# EAGLE board AlidadeEEBoxuCntrlr (EAGLE 4.13), part 1 of 2
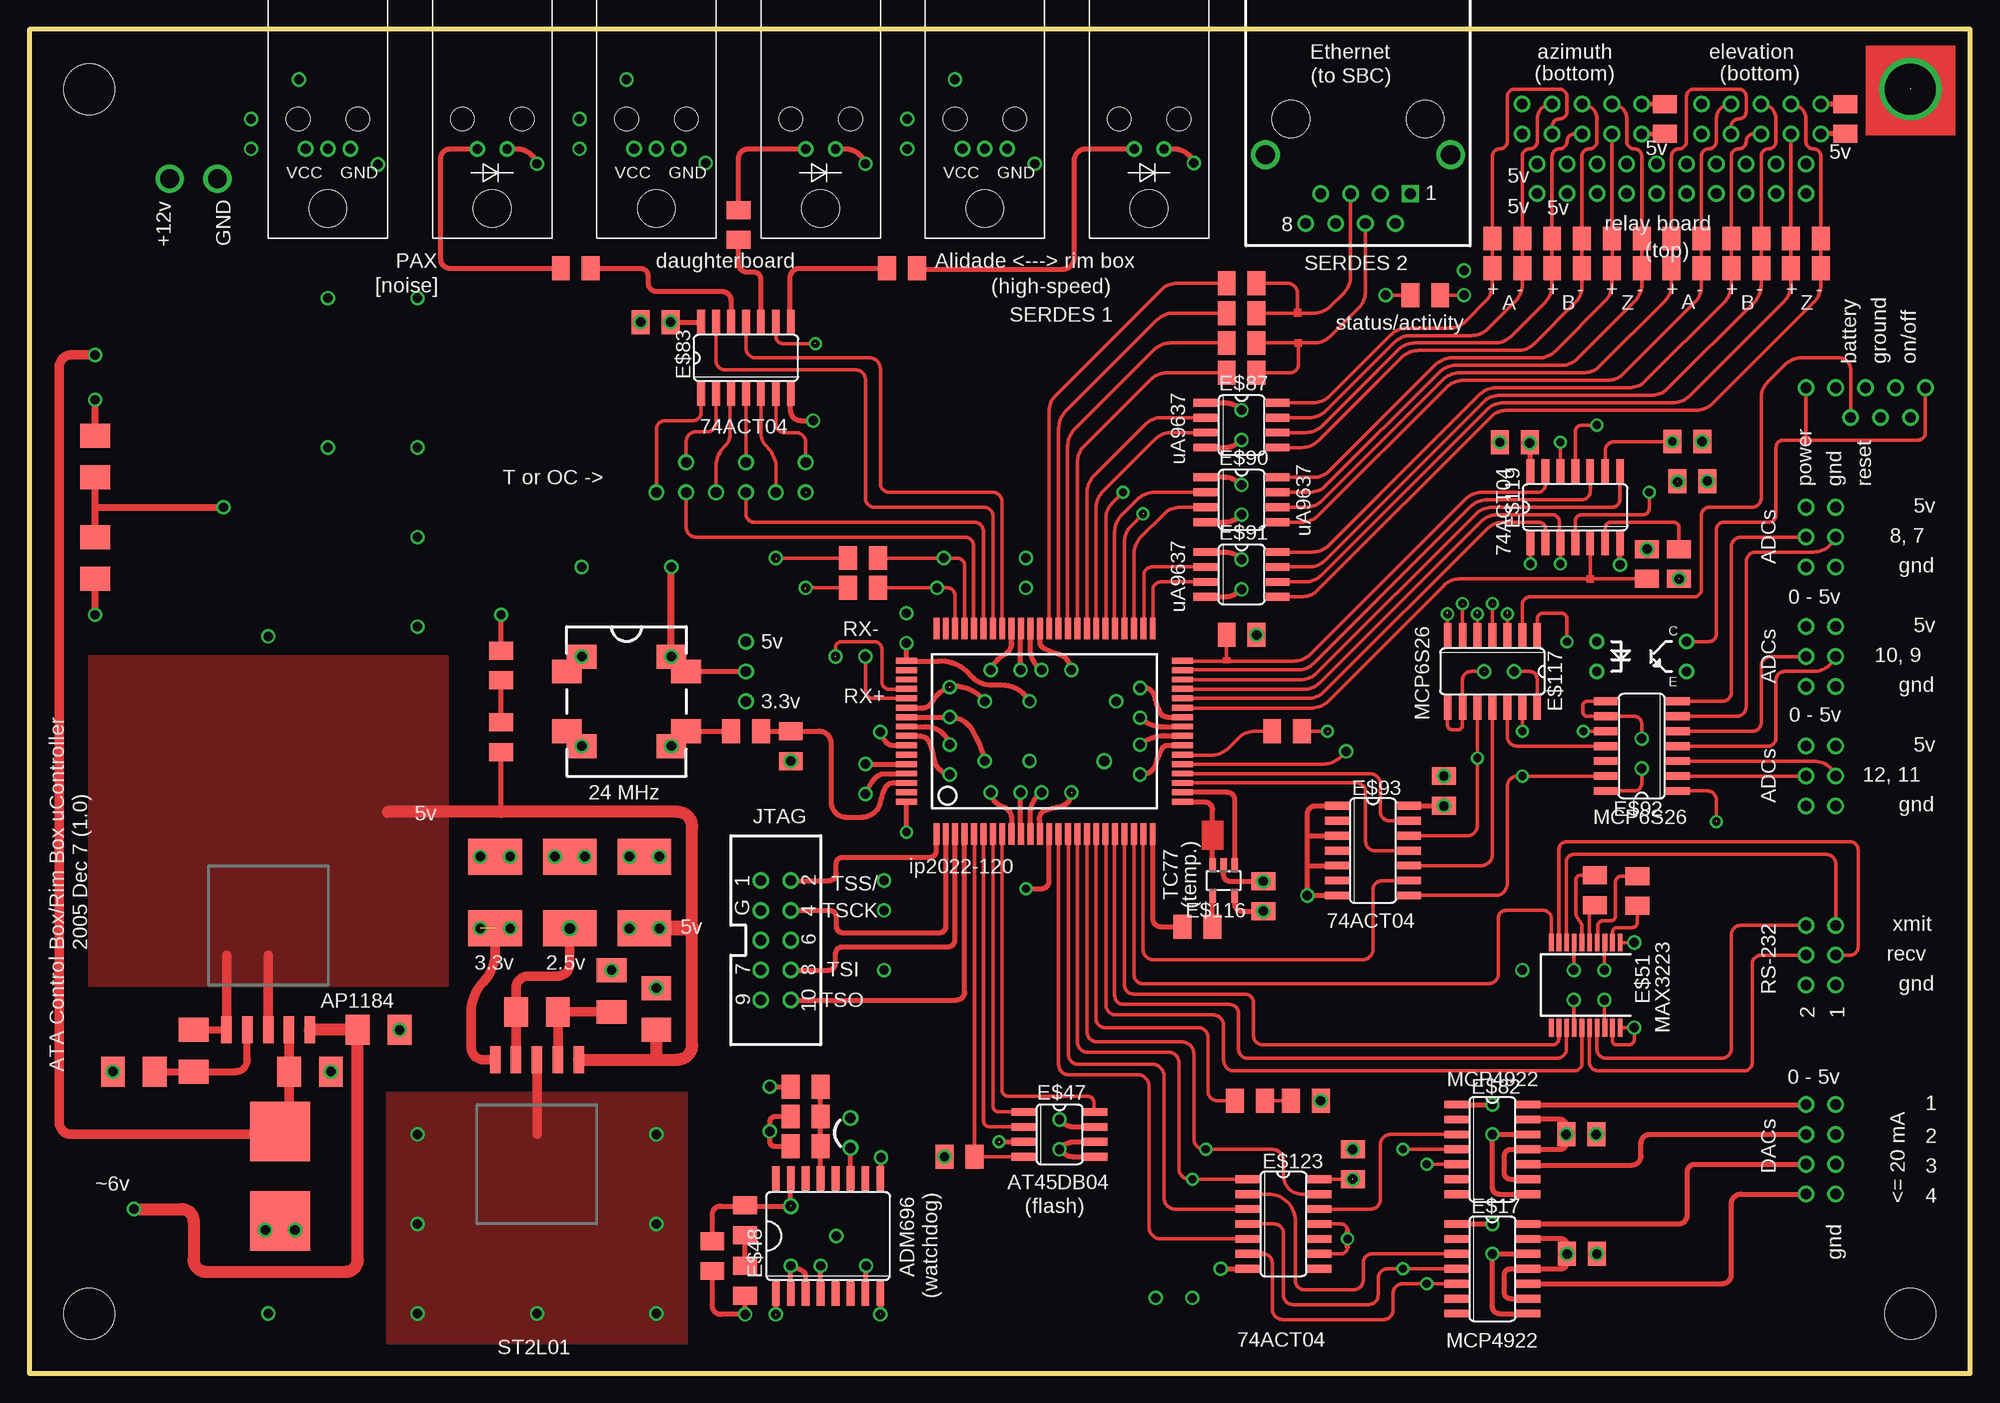
[diagram p0: board, top side]
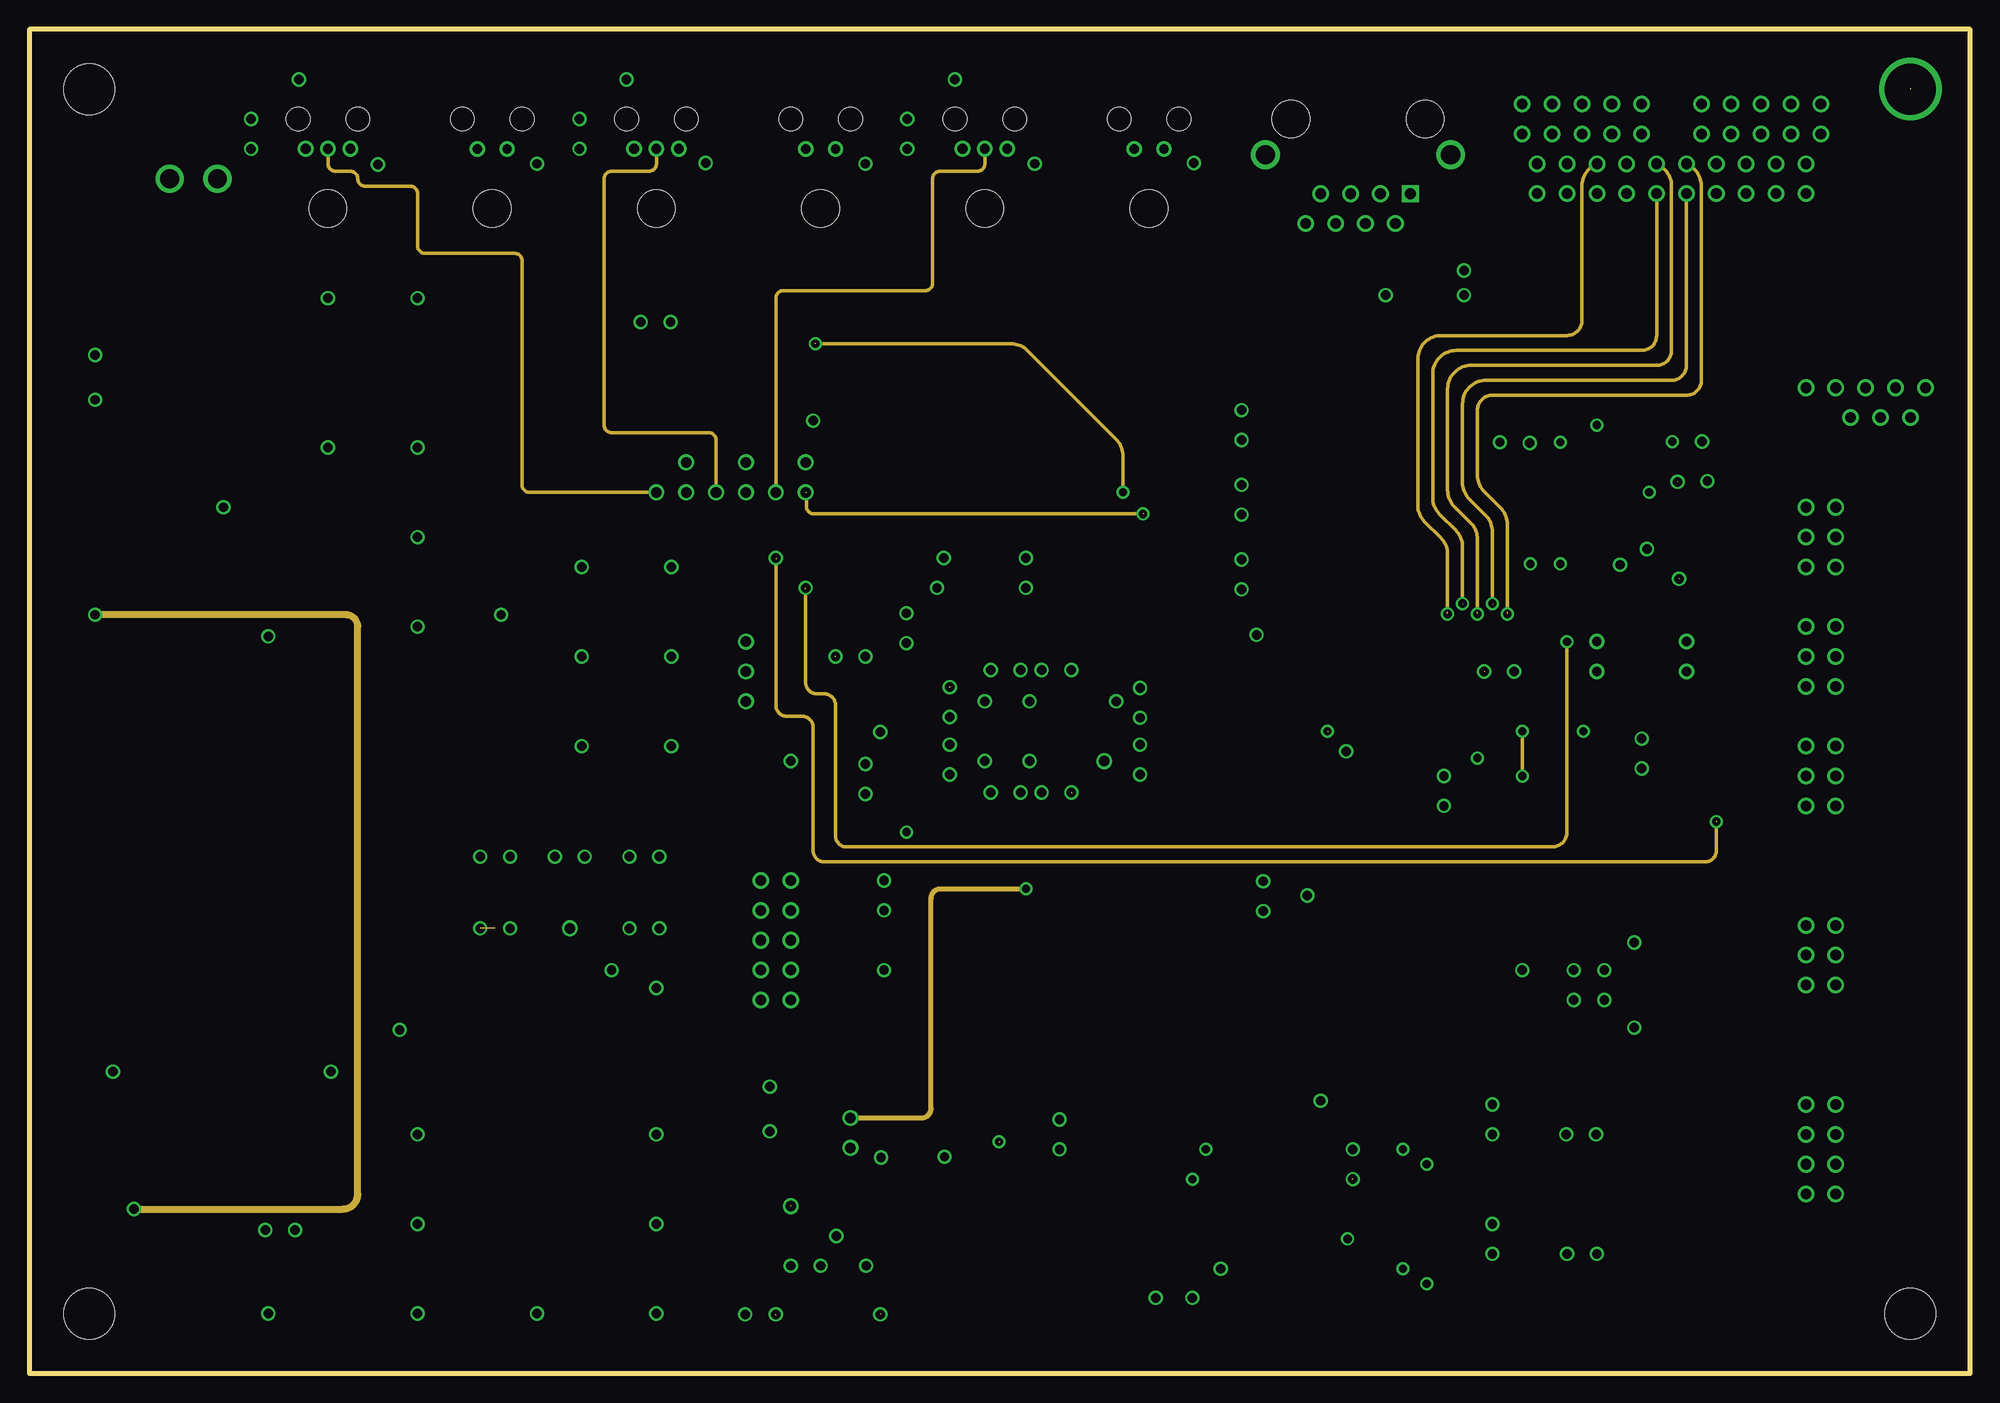
[diagram p1: board, inner layer Route2]
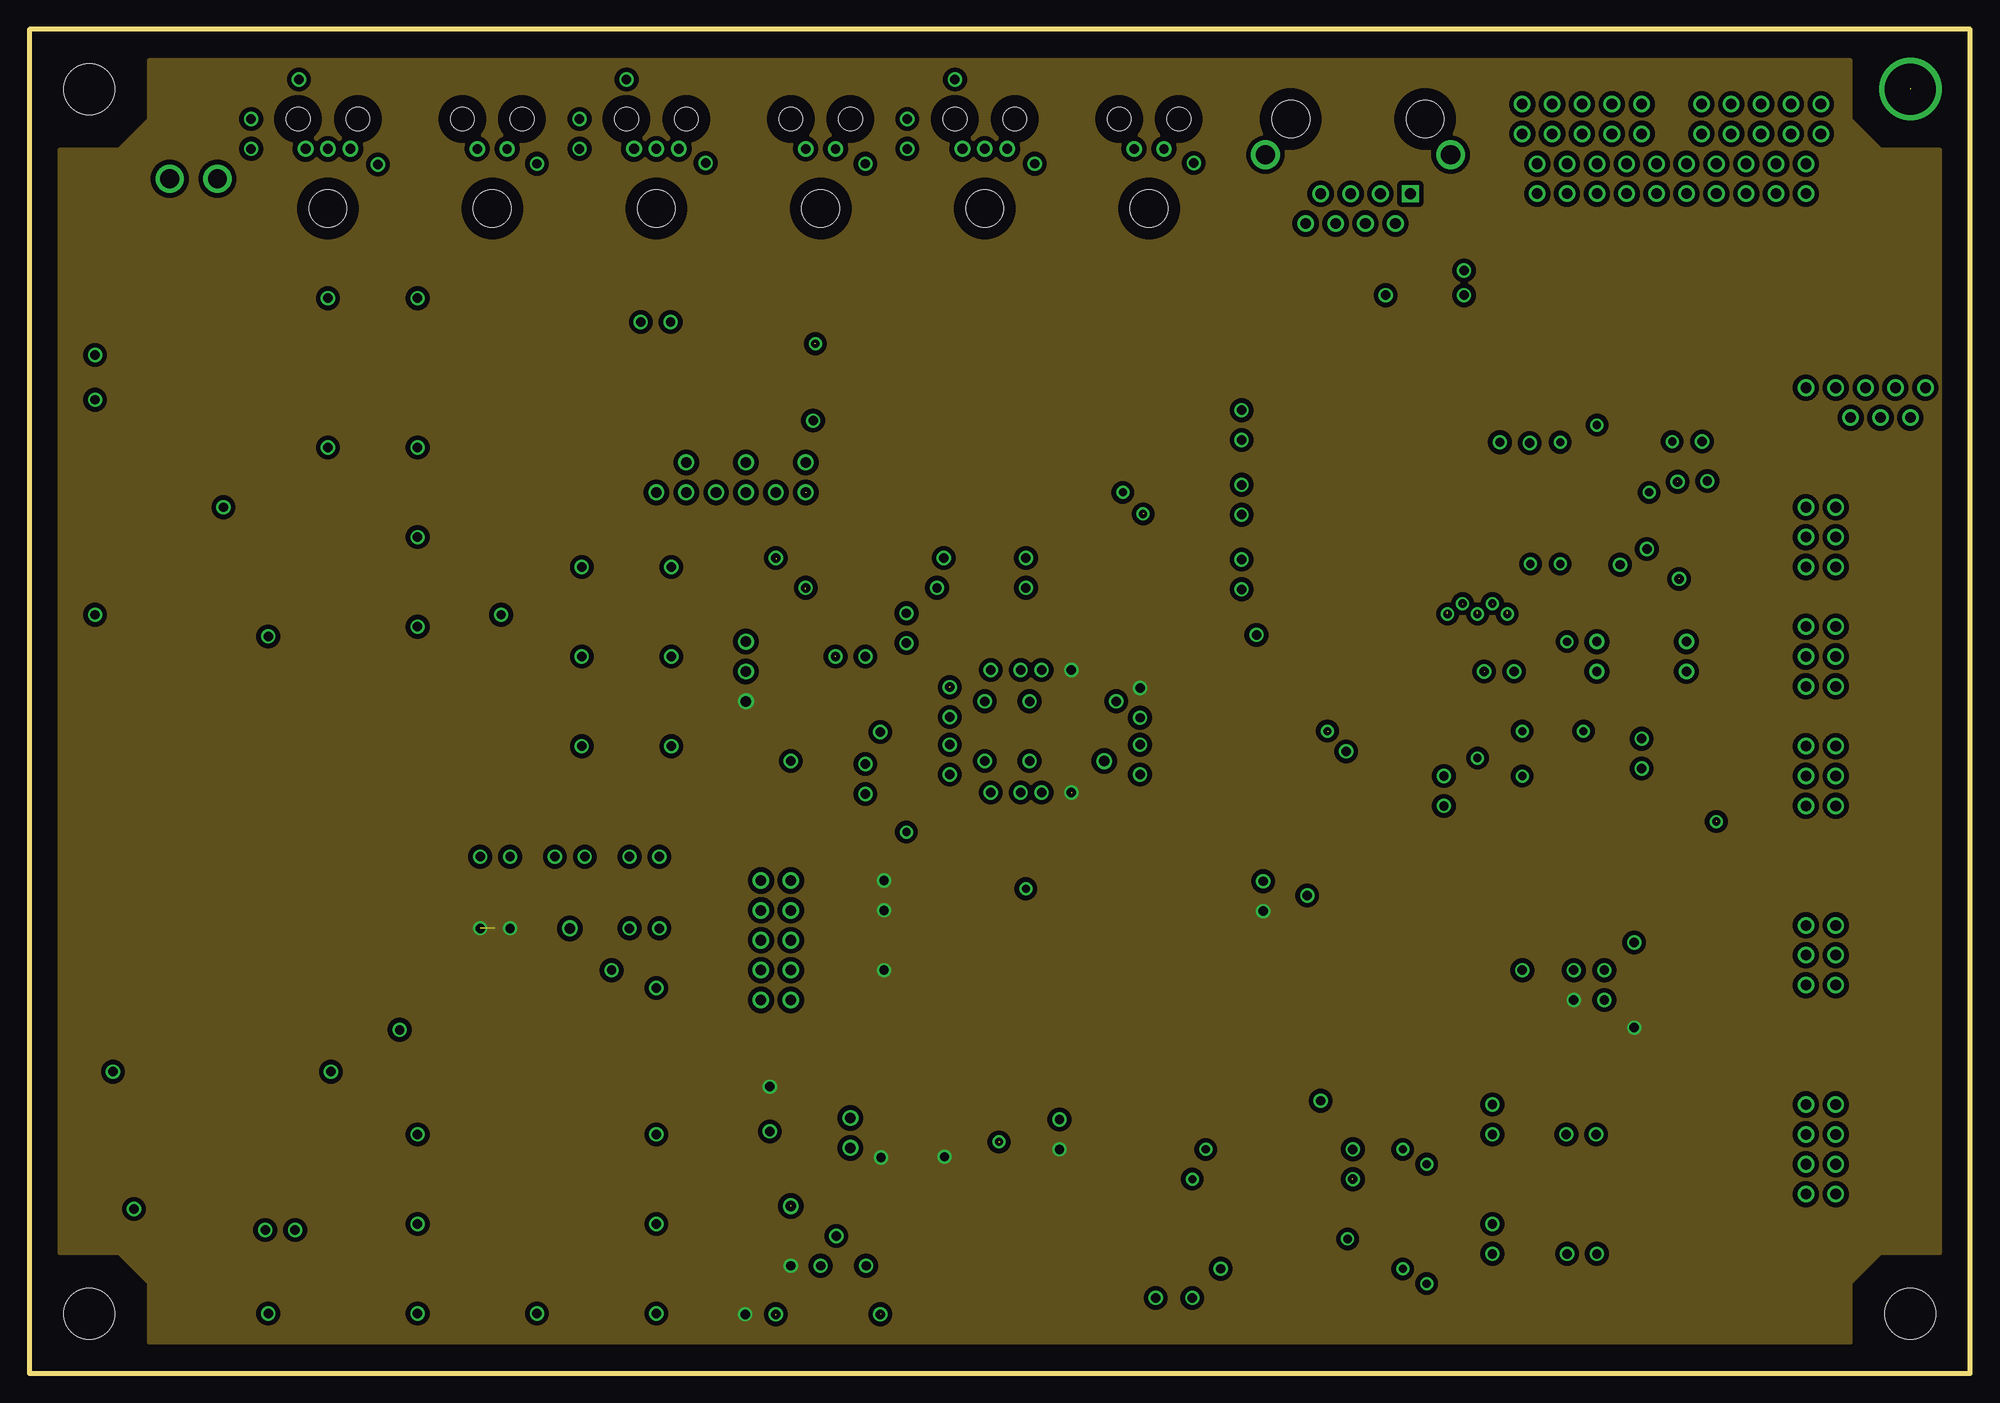
[diagram p2: board, inner layer Route3]
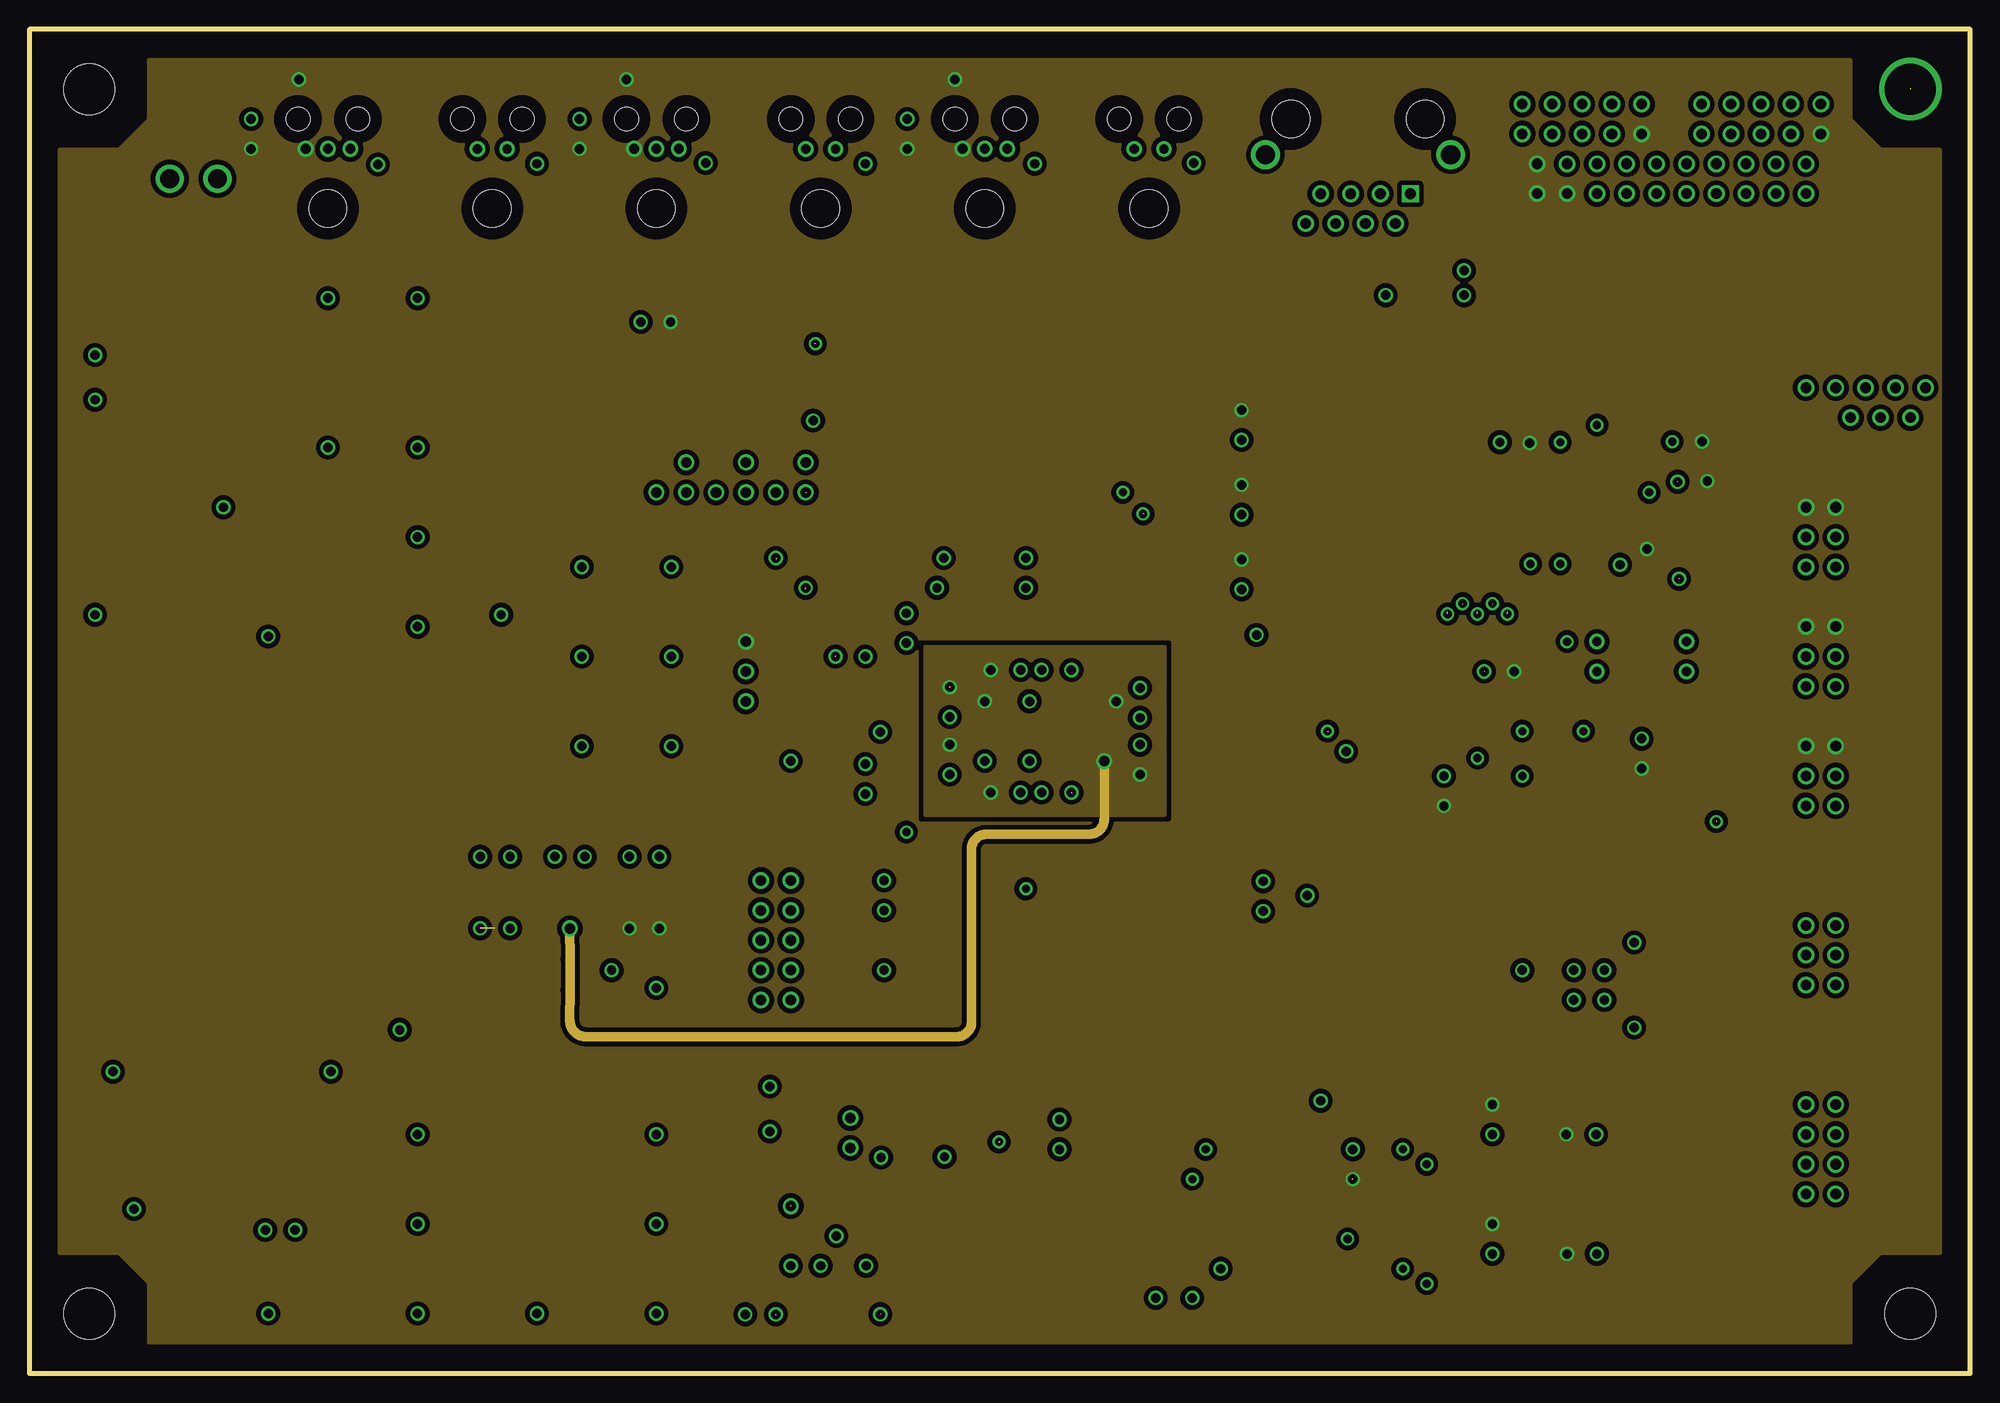
[diagram p3: board, inner layer Route14]
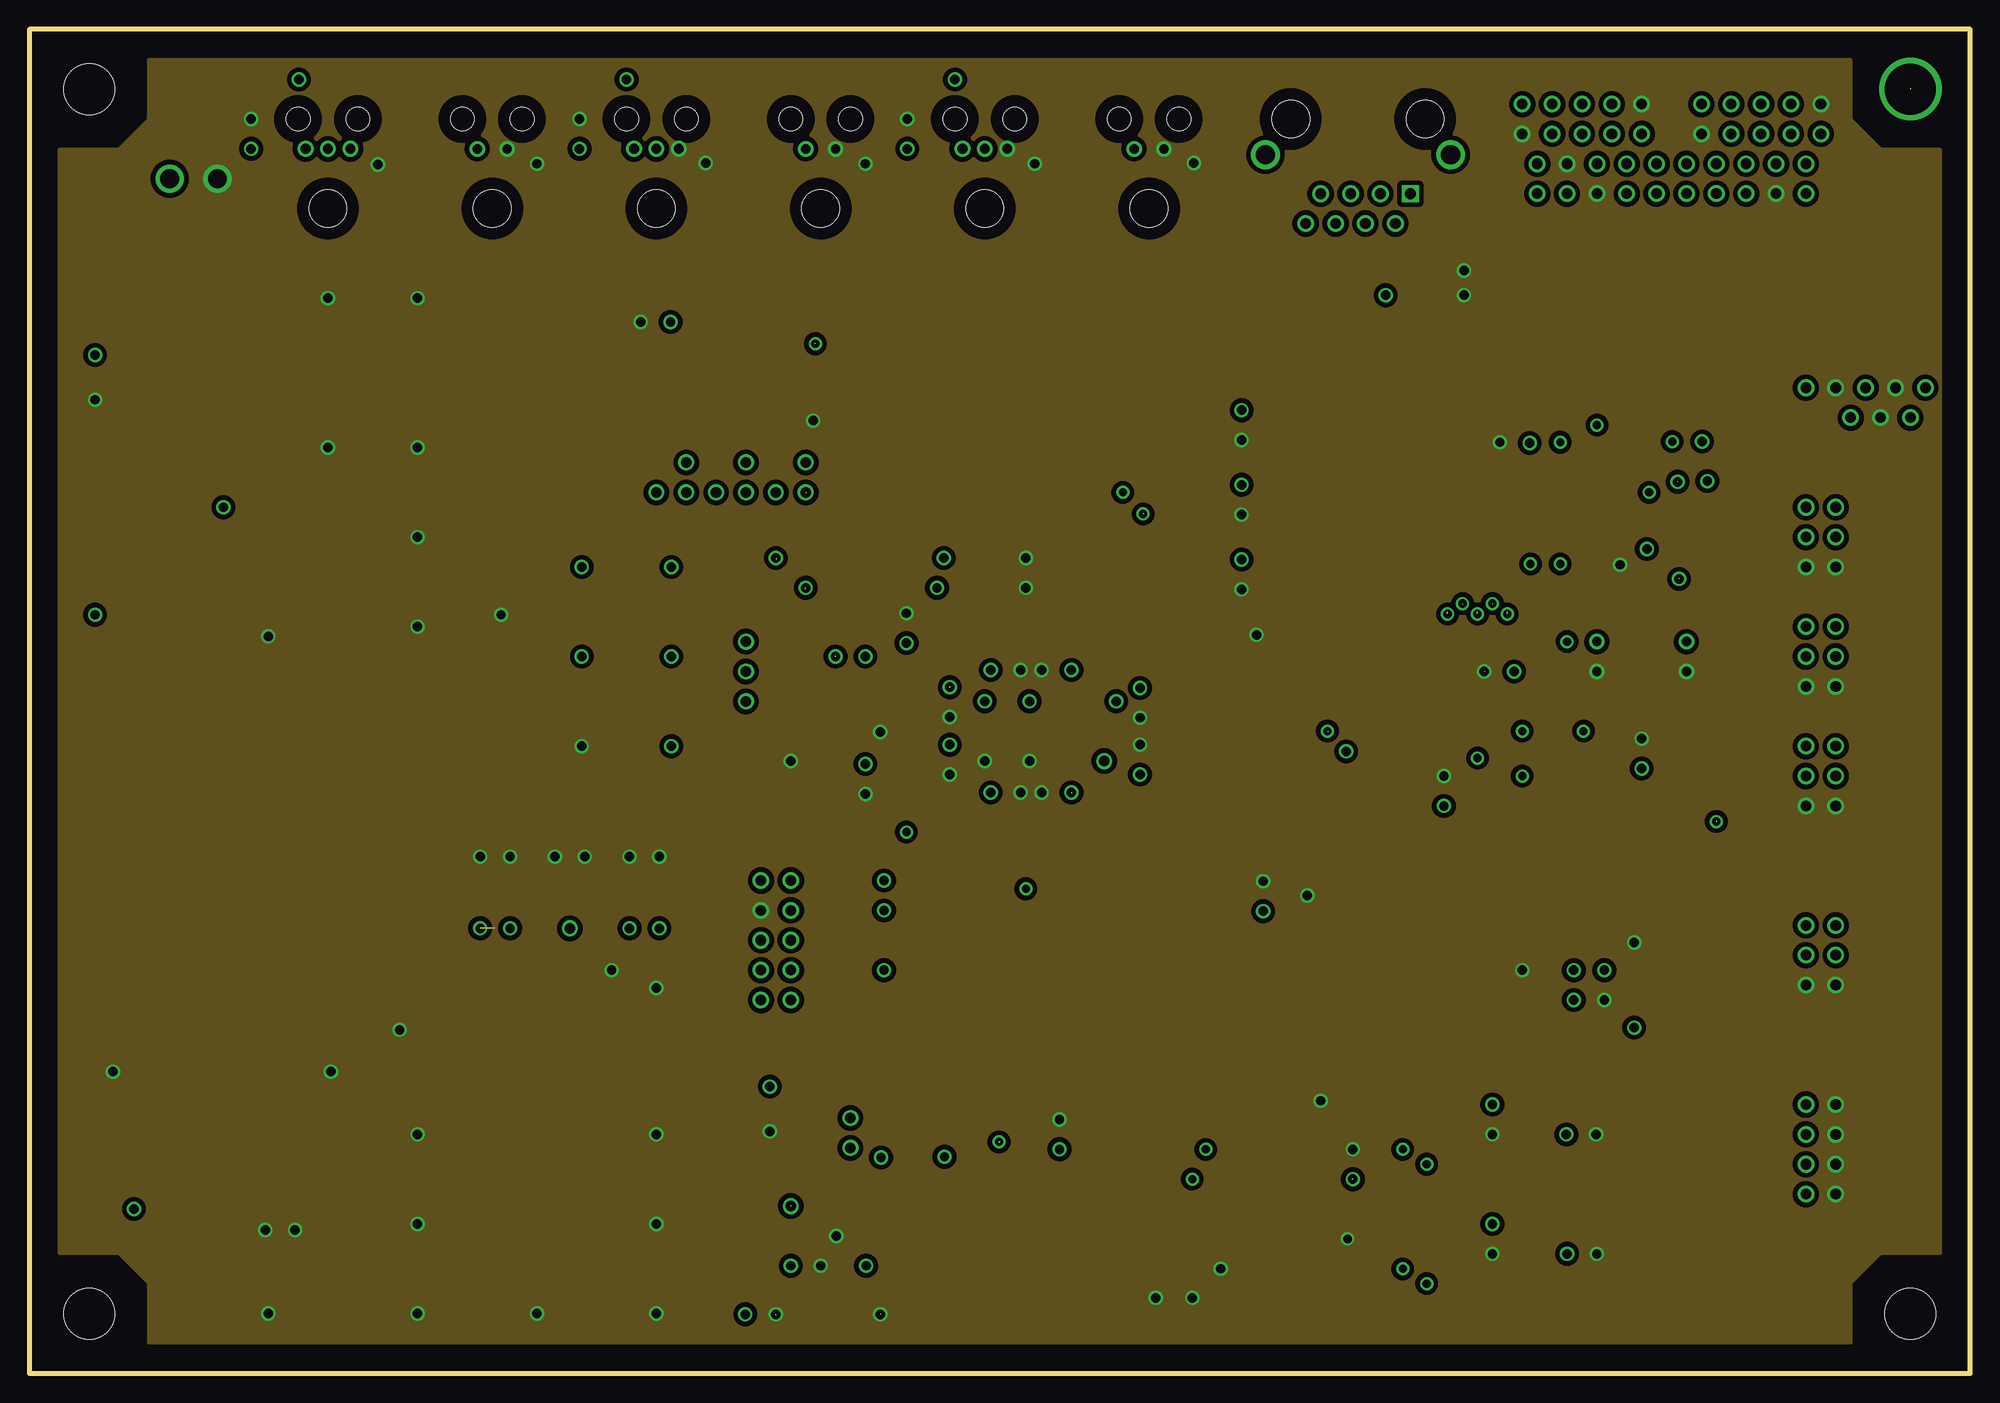
[diagram p4: board, inner layer Route15]
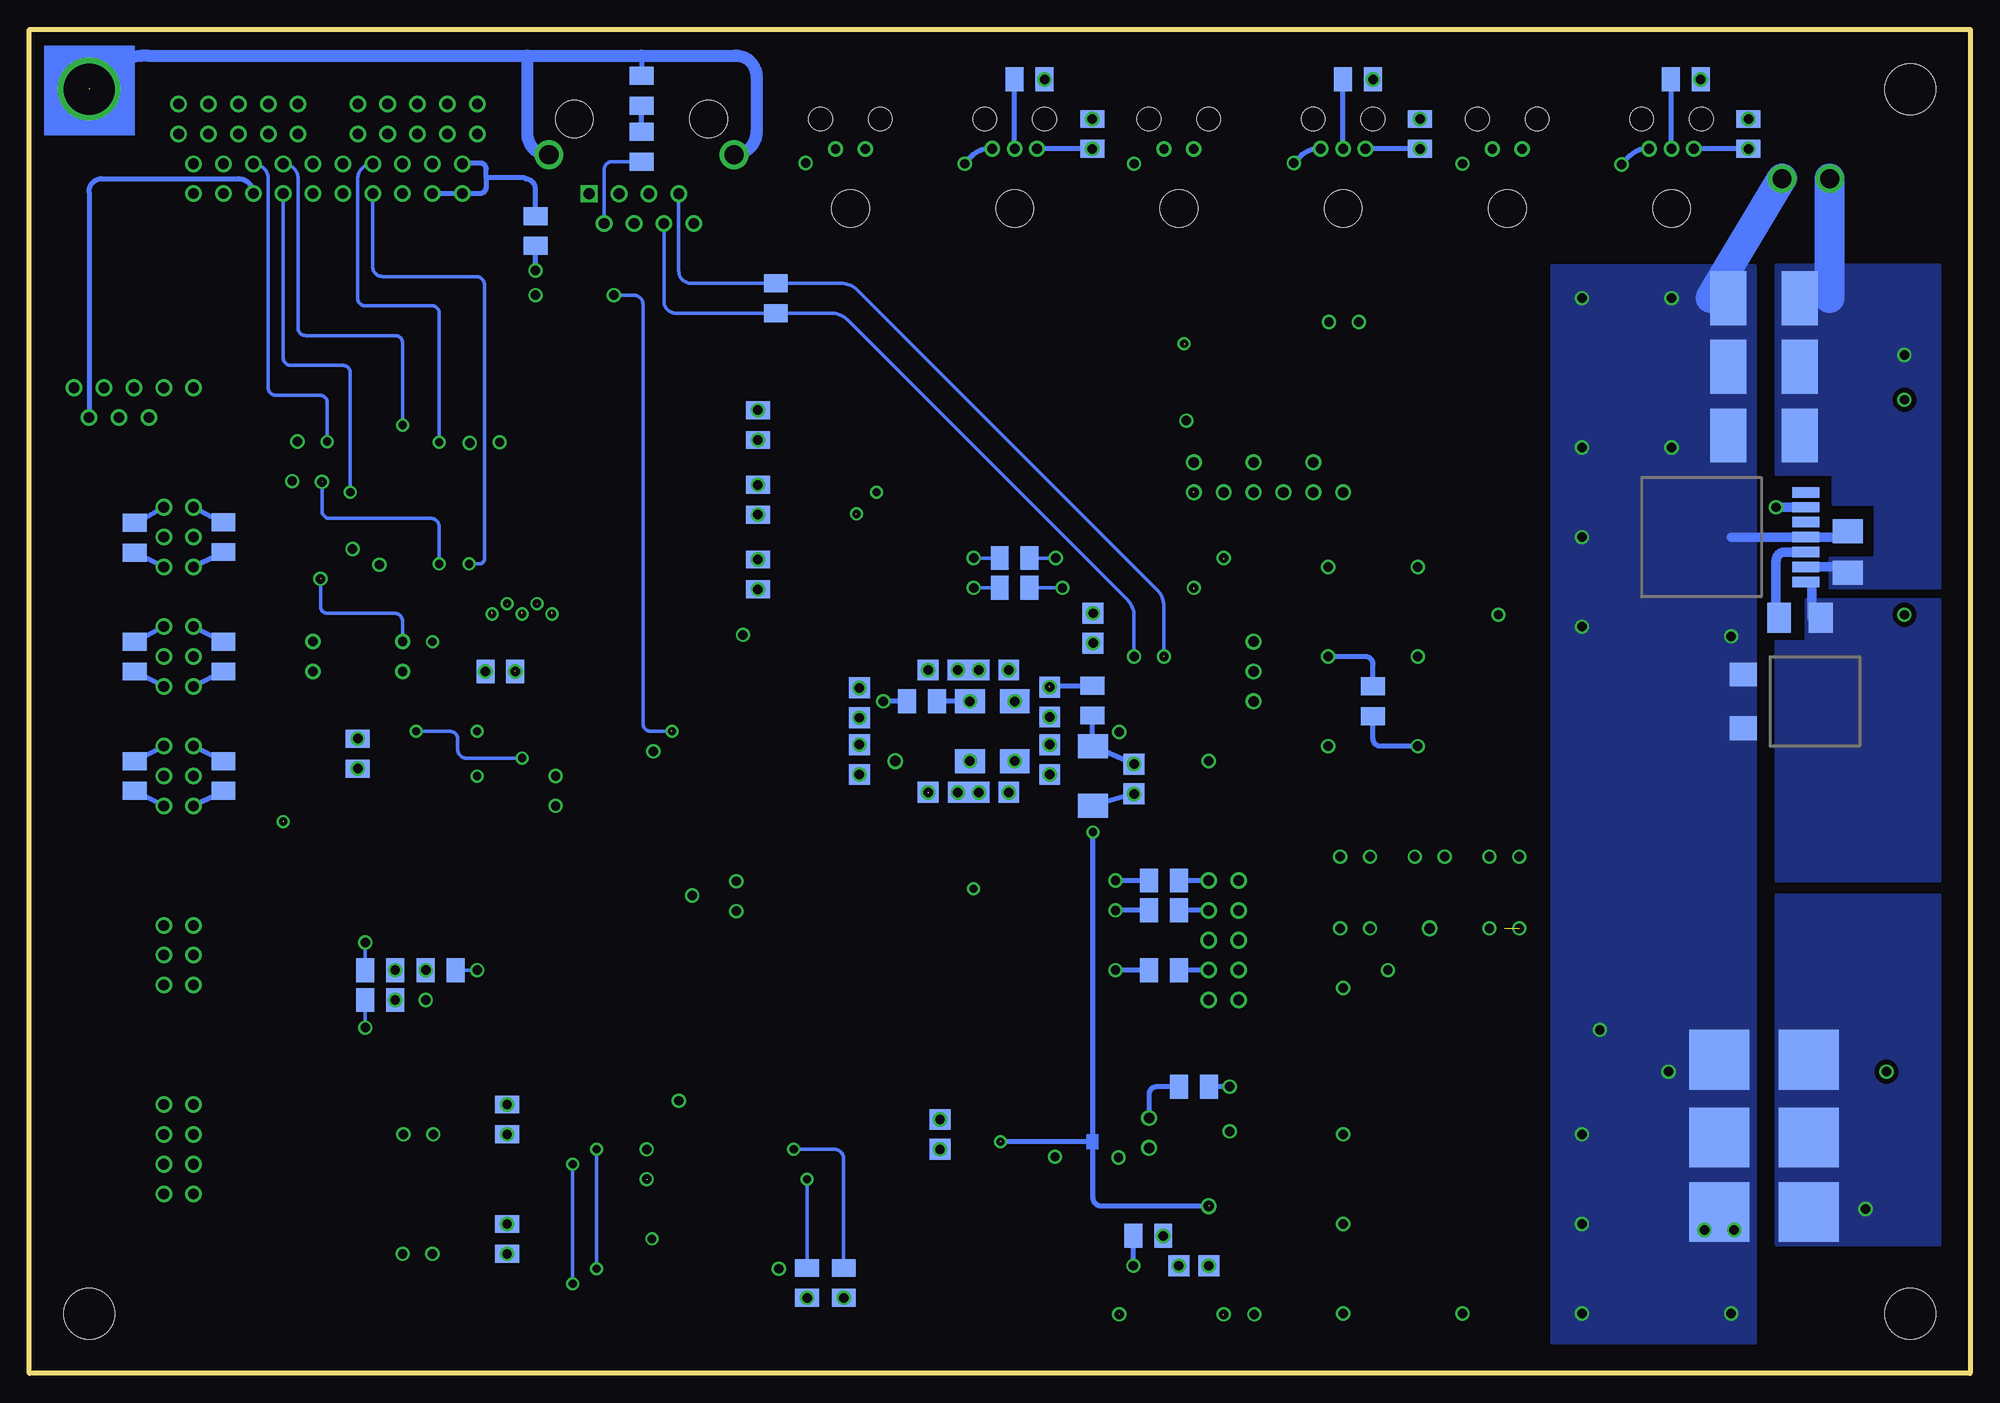
[diagram p5: board, bottom side, seen from below]

Size 165.1 x 114.3 mm. Coordinates in mm from the lower left corner, seen from the top.
Outline: 0,0 165.1,0 165.1,114.3 0,114.3 0,0
Copper layers (1*2+3*14+15*16): Top 0.035mm / dielectric 1.5mm / Route2 0.035mm / dielectric 0.15mm / Route3 0.035mm / dielectric 0.2mm / Route14 0.035mm / dielectric 0.15mm / Route15 0.035mm / dielectric 0.2mm / Bottom 0.035mm
Design rules "default": minimum track width 10mil, minimum drill 24mil, track to track 8mil, track to pad 8mil, pad to pad 8mil, via to via 8mil, smd to smd 8mil, copper to edge 40mil, drill to drill 8mil, minimum pad ring 10mil, minimum via ring 8mil, stop-mask expansion 4mil, vias tented up to drill 0mil, thermal gap 10mil
Holes 4.32 mm at 5.08,109.22 160.02,5.08 5.08,5.08

## Footprints (pad centres in the part's own frame; a part is rotated, then mirrored left to right if it is on the bottom)
TWOPRONGPWRCONNECTOR = drill 1.6 round: P$1 -2.032,0; P$2 2.032,0
IFD96 = drill 0.838 round: P$1 0,0; P$2 -1.905,0; P$3 1.905,0 | hole 2: -2.54,2.54; 2.54,2.54 | hole 3.2: 0,-5.08
IFE96 = drill 0.8 round: P$1 -1.27,0; P$2 1.27,0 | hole 3.2: 0,-5.08 | hole 2: -2.54,2.54; 2.54,2.54
2X5HEADER = drill 0.9 round: P$1 0,-1.27; P$2 -2.54,-1.27; P$3 -5.08,-1.27; P$4 2.54,-1.27; P$5 5.08,-1.27; P$6 -5.08,1.27; P$7 -2.54,1.27; P$8 0,1.27; P$9 2.54,1.27; P$10 5.08,1.27
2X10HEADER = drill 0.9 round: P$1 -1.27,-1.27; P$2 -3.81,-1.27; P$3 -6.35,-1.27; P$4 -8.89,-1.27; P$5 -11.43,-1.27; P$6 -11.43,1.27; P$7 -8.89,1.27; P$8 -6.35,1.27; P$9 -3.81,1.27; P$10 -1.27,1.27; P$11 1.27,-1.27; P$12 3.81,-1.27; P$13 6.35,-1.27; P$14 8.89,-1.27; P$15 11.43,-1.27; P$16 11.43,1.27; P$17 8.89,1.27; P$18 6.35,1.27; P$19 3.81,1.27; P$20 1.27,1.27
LF1S028 = drill 0.914 square: 1 4.445,-6.35 | drill 0.914 round: 2 3.175,-8.89; 3 1.905,-6.35; 4 0.635,-8.89; 5 -0.635,-6.35; 6 -1.905,-8.89; 7 -3.175,-6.35; 8 -4.445,-8.89 | drill 1.626 round: S1 -7.874,-3.048; S2 7.874,-3.048 | hole 3.2: -5.715,0; 5.715,0
3PINHEADER = drill 0.9 round: P$1 0,0; P$2 -2.54,0; P$3 2.54,0
2X3HEADER = drill 0.9 round: P$1 0,-1.27; P$2 -2.54,-1.27; P$3 2.54,-1.27; P$4 2.54,1.27; P$5 -2.54,1.27; P$6 0,1.27
SO14 = smd 0.66 x 2.032: 1 -3.81,-3.073; 2 -2.54,-3.073; 3 -1.27,-3.073; 4 0,-3.073; 5 1.27,-3.073; 6 2.54,-3.073; 7 3.81,-3.073; 8 3.81,3.073; 9 2.54,3.073; 10 1.27,3.073; 11 0,3.073; 12 -1.27,3.073; 13 -2.54,3.073; 14 -3.81,3.073
2X4HEADER = drill 0.9 round: P$1 -1.27,-1.27; P$2 -3.81,-1.27; P$3 -3.81,1.27; P$4 -1.27,1.27; P$5 1.27,1.27; P$6 3.81,1.27; P$7 3.81,-1.27; P$8 1.27,-1.27
SMALLTANTALUM = smd 4.572 x 3.048: P$1 0,3.048; P$2 0,-3.048
LM2677 = smd 0.889 x 2.286: P$1 0,6.35; P$2 -2.54,6.35; P$3 -1.27,6.35; P$4 -3.81,6.35; P$5 2.54,6.35; P$6 1.27,6.35; P$7 3.81,6.35
50WQ03FN = smd 2.032 x 2.286: P$1 -2.286,4.826; P$2 2.286,4.826
LARGETANTALUM = smd 5.08 x 5.08: P$1 0,3.81; P$2 0,-3.81
SMD1206 = smd 2.54 x 2.032: P$1 0,1.778; P$2 0,-1.778
AP1184 = smd 0.889 x 2.286: P$1 0,6.35; P$3 -1.778,6.35; P$4 -3.556,6.35; P$6 1.778,6.35; P$7 3.556,6.35
80PQFP = smd 0.5 x 1.8: 1 -9.2,-8.735; 2 -8.4,-8.735; 3 -7.6,-8.735; 4 -6.8,-8.735; 5 -6,-8.735; 6 -5.2,-8.735; 7 -4.4,-8.735; 8 -3.6,-8.735; 9 -2.8,-8.735; 10 -2,-8.735; 11 -1.2,-8.735; 12 -0.4,-8.735; 13 0.4,-8.735; 14 1.2,-8.735; 15 2,-8.735; 16 2.8,-8.735; 17 3.6,-8.735; 18 4.4,-8.735; 19 5.2,-8.735; 20 6,-8.735; 21 6.8,-8.735; 22 7.6,-8.735; 23 8.4,-8.735; 24 9.2,-8.735; 41 9.2,8.735; 42 8.4,8.735; 43 7.6,8.735; 44 6.8,8.735; 45 6,8.735; 46 5.2,8.735; 47 4.4,8.735; 48 3.6,8.735; 49 2.8,8.735; 50 2,8.735; 51 1.2,8.735; 52 0.4,8.735; 53 -0.4,8.735; 54 -1.2,8.735; 55 -2,8.735; 56 -2.8,8.735; 57 -3.6,8.735; 58 -4.4,8.735; 59 -5.2,8.735; 60 -6,8.735; 61 -6.8,8.735; 62 -7.6,8.735; 63 -8.4,8.735; 64 -9.2,8.735 | smd 1.8 x 0.5: 25 11.735,-5.2; 26 11.735,-4.4; 27 11.735,-3.6; 28 11.735,-2.8; 29 11.735,-2; 30 11.735,-1.2; 31 11.735,-6; 32 11.735,-0.4; 33 11.735,0.4; 34 11.735,1.2; 35 11.735,2; 36 11.735,2.8; 37 11.735,3.6; 38 11.735,4.4; 39 11.735,5.2; 40 11.735,6; 65 -11.735,6; 66 -11.735,5.2; 67 -11.735,4.4; 68 -11.735,3.6; 69 -11.735,2.8; 70 -11.735,2; 71 -11.735,1.2; 72 -11.735,0.4; 73 -11.735,-0.4; 74 -11.735,-1.2; 75 -11.735,-2; 76 -11.735,-2.8; 77 -11.735,-3.6; 78 -11.735,-4.4; 79 -11.735,-5.2; 80 -11.735,-6
SQUAREPAD100X80 = smd 2.54 x 2.032: P$1 0,0
SMD0805 = smd 2.032 x 1.524: P$1 0,1.27; P$2 0,-1.27
JTAG2X5 = drill 0.9 round: P$1 0,1.27; P$2 0,-1.27; P$3 -2.54,-1.27; P$4 -2.54,1.27; P$5 -5.08,1.27; P$6 -5.08,-1.27; P$7 2.54,-1.27; P$8 2.54,1.27; P$9 5.08,1.27; P$10 5.08,-1.27
SO08 = smd 0.66 x 2.032: 1 -1.905,-3.073; 2 -0.635,-3.073; 3 0.635,-3.073; 4 1.905,-3.073; 5 1.905,3.073; 6 0.635,3.073; 7 -0.635,3.073; 8 -1.905,3.073
SO16L = smd 0.66 x 2.032: 1 -4.445,-4.902; 2 -3.175,-4.902; 3 -1.905,-4.902; 4 -0.635,-4.902; 5 0.635,-4.902; 6 1.905,-4.902; 7 3.175,-4.902; 8 4.445,-4.902; 9 4.445,4.902; 10 3.175,4.902; 11 1.905,4.902; 12 0.635,4.902; 13 -0.635,4.902; 14 -1.905,4.902; 15 -3.175,4.902; 16 -4.445,4.902
SSOP20 = smd 0.4 x 1.5: 1 -2.925,-3.625; 2 -2.275,-3.625; 3 -1.625,-3.625; 4 -0.975,-3.625; 5 -0.325,-3.625; 6 0.325,-3.625; 7 0.975,-3.625; 8 1.625,-3.625; 9 2.275,-3.625; 10 2.925,-3.625; 11 2.925,3.625; 12 2.275,3.625; 13 1.625,3.625; 14 0.975,3.625; 15 0.325,3.625; 16 -0.325,3.625; 17 -0.975,3.625; 18 -1.625,3.625; 19 -2.275,3.625; 20 -2.925,3.625
5PINHEADER = drill 0.9 round: P$1 0,0; P$2 -2.54,0; P$3 -5.08,0; P$4 2.54,0; P$5 5.08,0
SMTOSCILLATOR = smd 2.54 x 2.032: P$1 -5.08,-2.54; P$2 -5.08,2.54; P$3 5.08,2.54; P$4 5.08,-2.54
BYPASSPAD = smd 1.778 x 1.778: P$2 0,0
SOT23-5L = smd 0.55 x 1.2: 1 -0.95,-1.3; 2 0,-1.3; 3 0.95,-1.3; 4 0.95,1.3; 5 -0.95,1.3
OPTOISOLATOR4PIN = drill 0.8 round: P$1 -3.81,1.27; P$2 -3.81,-1.27; P$3 3.81,1.27; P$4 3.81,-1.27

## Placement (x,y rotation side)
E$1  [TWOPRONGPWRCONNECTOR]  13.97,101.6 0 top
E$2  [IFD96]  25.4,104.14 0 top
E$3  [IFD96]  53.34,104.14 0 top
E$4  [IFD96]  81.28,104.14 0 top
E$5  [IFE96]  39.37,104.14 0 top
E$6  [IFE96]  67.31,104.14 0 top
E$7  [IFE96]  95.25,104.14 0 top
E$8  [2X5HEADER]  132.08,106.68 0 top
E$9  [2X5HEADER]  147.32,106.68 0 top
E$10  [2X10HEADER]  139.7,101.6 0 top
E$11  [LF1S028]  113.03,106.68 0 top
E$12  [3PINHEADER]  157.48,81.28 0 top
E$13  [2X3HEADER]  152.4,50.8 90 top
E$14  [2X3HEADER]  152.4,60.96 90 top
E$15  [2X3HEADER]  152.4,35.56 90 top
E$16  [2X3HEADER]  152.4,71.12 90 top
E$17  [SO14]  124.46,8.89 270 top
E$18  [2X4HEADER]  152.4,19.05 90 top
E$19  [SMALLTANTALUM]  17.53,91.44 270 bottom
E$20  [SMALLTANTALUM]  17.53,85.6 270 bottom
E$21  [SMALLTANTALUM]  17.53,79.76 270 bottom
E$22  [LM2677]  20.32,71.12 270 bottom
E$23  [50WQ03FN]  14.48,57.15 90 bottom
E$24  [LARGETANTALUM]  17.53,20.07 270 bottom
E$25  [LARGETANTALUM]  17.53,26.67 270 bottom
E$26  [LARGETANTALUM]  17.53,13.72 270 bottom
E$27  [SMD1206]  10.41,69.85 180 bottom
E$28  [SMD1206]  14.48,64.26 90 bottom
E$29  [AP1184]  20.32,35.56 180 top
E$30  [SMD1206]  5.59,69.34 0 top
E$31  [SMD1206]  5.59,77.98 0 top
E$32  [80PQFP]  86.36,54.61 0 top
E$33  [LARGETANTALUM]  21.34,16.76 180 top
E$34  [SMD1206]  29.72,29.21 90 top
E$35  [SMD1206]  23.88,25.65 90 top
E$36  [SMD1206]  13.97,27.43 180 top
E$37  [SMD1206]  8.89,25.65 270 top
E$38  [SQUAREPAD100X80]  81.28,52.07 180 bottom
E$39  [SQUAREPAD100X80]  81.28,57.15 180 bottom
E$40  [SQUAREPAD100X80]  85.09,52.07 180 bottom
E$41  [SQUAREPAD100X80]  85.09,57.15 180 bottom
E$42  [SMD0805]  89.15,57.15 270 bottom
E$43  [SQUAREPAD100X80]  74.61,48.26 180 bottom
E$44  [SQUAREPAD100X80]  74.61,53.34 180 bottom
E$45  [SMD0805]  74.68,57.21 0 bottom
E$46  [JTAG2X5]  63.5,36.83 270 top
E$47  [SO08]  87.63,20.32 270 top
E$48  [SO16L]  67.94,11.68 0 top
E$49  [SMD0805]  69.91,11.68 270 bottom
E$50  [SMD0805]  79.12,18.41 90 top
E$51  [SSOP20]  132.4,33.02 180 top
E$52  [SMD0805]  68.58,41.91 90 bottom
E$53  [SMD0805]  68.58,39.37 90 bottom
E$54  [SMD0805]  68.58,34.29 90 bottom
E$55  [SMD0805]  66.04,19.3 270 top
E$56  [SMD0805]  66.04,21.84 270 top
E$57  [SMD0805]  66.04,24.38 270 top
E$58  [SMD0805]  66.04,24.38 90 bottom
E$59  [SMD0805]  60.9,13.02 180 top
E$60  [SMD0805]  60.9,7.87 180 top
E$61  [SMD0805]  130.11,34.29 90 bottom
E$62  [SMD0805]  133.16,41.08 0 top
E$63  [SMD0805]  136.78,41.02 180 top
E$64  [SMD0805]  135.25,34.29 90 bottom
E$65  [AP1184]  43.18,20.32 0 top
E$66  [SMD0805]  135.25,31.75 90 bottom
E$67  [5PINHEADER]  156.21,83.82 0 top
E$68  [SMD1206]  43.18,30.73 90 top
E$69  [SMD1206]  49.53,32.51 180 top
E$70  [SMTOSCILLATOR]  50.8,57.15 0 top
E$71  [SMD1206]  53.34,30.99 180 top
E$72  [SMD0805]  50.8,57.15 0 bottom
E$73  [SMD0805]  60.96,54.61 90 top
E$74  [SMD0805]  64.77,53.34 180 top
E$75  [SMALLTANTALUM]  39.62,40.89 180 top
E$76  [SMALLTANTALUM]  45.97,40.89 180 top
E$77  [SMALLTANTALUM]  52.32,40.89 0 top
E$78  [SQUAREPAD100X80]  46.99,60.96 0 top
E$79  [SQUAREPAD100X80]  54.61,60.96 0 top
E$80  [SQUAREPAD100X80]  46.99,53.34 0 top
E$81  [SQUAREPAD100X80]  54.61,53.34 0 top
E$82  [SO14]  124.46,19.05 270 top
E$83  [SO14]  60.96,86.36 0 top
E$84  [SMD0805]  125.73,96.52 90 top
E$85  [SMD0805]  40.13,54.1 0 top
E$86  [SMD0805]  40.13,60.2 0 top
E$87  [SO08]  103.12,80.64 270 top
E$88  [BYPASSPAD]  87.63,19.05 180 bottom
E$89  [BYPASSPAD]  87.63,21.59 180 bottom
E$90  [SO08]  103.12,74.3 270 top
E$91  [SO08]  103.12,67.94 270 top
E$92  [SO14]  137.16,53.34 90 top
E$93  [SO14]  114.3,44.45 270 top
E$94  [BYPASSPAD]  67.31,9.14 180 bottom
E$95  [BYPASSPAD]  64.77,9.14 180 bottom
E$96  [BYPASSPAD]  81.79,49.4 270 bottom
E$97  [BYPASSPAD]  84.33,49.4 270 bottom
E$98  [BYPASSPAD]  86.04,49.4 270 bottom
E$99  [BYPASSPAD]  88.65,49.4 270 bottom
E$100  [BYPASSPAD]  94.49,50.93 270 bottom
E$101  [BYPASSPAD]  94.49,53.47 270 bottom
E$102  [BYPASSPAD]  94.49,55.75 270 bottom
E$103  [BYPASSPAD]  94.49,58.29 270 bottom
E$104  [BYPASSPAD]  88.65,59.82 270 bottom
E$105  [BYPASSPAD]  86.11,59.82 270 bottom
E$106  [BYPASSPAD]  84.33,59.82 270 bottom
E$107  [BYPASSPAD]  81.79,59.82 270 bottom
E$108  [BYPASSPAD]  74.61,62.1 270 bottom
E$109  [BYPASSPAD]  74.61,64.64 270 bottom
E$110  [BYPASSPAD]  78.3,50.93 270 bottom
E$111  [BYPASSPAD]  78.3,53.47 270 bottom
E$112  [BYPASSPAD]  78.3,55.82 270 bottom
E$113  [BYPASSPAD]  78.3,58.36 270 bottom
E$114  [BYPASSPAD]  71.12,49.28 0 bottom
E$115  [BYPASSPAD]  71.12,51.82 0 bottom
E$116  [SOT23-5L]  101.6,41.91 180 top
E$117  [SO14]  124.46,59.69 180 top
E$118  [OPTOISOLATOR4PIN]  137.16,60.96 0 top
E$119  [SO14]  131.51,73.66 0 top
E$120  [SMD0805]  58.1,9.97 0 top
E$121  [SMD0805]  99.38,37.97 90 top
E$122  [SMD0805]  104.97,40.58 0 top
E$123  [SO14]  106.68,12.7 270 top
E$124  [SMD0805]  124.46,21.59 0 bottom
E$125  [SMD0805]  124.46,11.43 0 bottom
E$126  [SMD0805]  132.02,20.32 90 top
E$127  [SMD0805]  132.08,10.16 90 top
E$128  [SMD0805]  112.59,17.78 0 top
E$129  [SMD0805]  120.33,49.53 0 top
E$130  [SMD0805]  125.03,59.69 270 bottom
E$131  [SMD0805]  137.16,52.7 180 bottom
E$132  [SMD0805]  103.82,23.18 90 top
E$133  [SMD0805]  108.58,23.18 90 top
E$134  [SMD0805]  60.33,97.66 0 top
E$135  [SMD0805]  46.48,93.98 90 top
E$136  [SMD0805]  74.23,93.98 90 top
E$137  [SMD0805]  53.28,89.41 90 top
E$138  [SMD0805]  101.6,91.44 0 bottom
E$139  [SMD0805]  70.93,66.8 90 top
E$140  [SMD0805]  70.93,69.34 90 top
E$141  [SMD0805]  81.28,69.34 270 bottom
E$142  [SMD0805]  81.28,66.8 270 bottom
E$143  [SMD0805]  103.12,92.71 90 top
E$144  [SMD0805]  103.12,90.17 90 top
E$145  [SMD0805]  103.12,87.63 90 top
E$146  [SMD0805]  103.12,85.09 90 top
E$147  [SMD0805]  130.81,96.52 90 top
E$148  [SMD0805]  135.89,96.52 90 top
E$149  [SMD0805]  140.97,96.52 90 top
E$150  [SMD0805]  146.05,96.52 90 top
E$151  [SMD0805]  151.13,96.52 90 top
E$152  [SMD0805]  151.13,93.98 90 top
E$153  [SMD0805]  146.05,93.98 90 top
E$154  [SMD0805]  140.97,93.98 90 top
E$155  [SMD0805]  135.89,93.98 90 top
E$156  [SMD0805]  130.81,93.98 90 top
E$157  [SMD0805]  125.73,93.98 90 top
E$158  [SMD0805]  137.6,68.83 180 top
E$159  [SMD0805]  140.34,68.83 0 top
E$160  [SMD0805]  126.36,79.18 90 top
E$161  [SMD0805]  141.03,79.25 90 top
E$162  [SMD0805]  141.48,75.88 90 top
E$163  [SMD0805]  113.03,109.09 0 bottom
E$164  [SMD0805]  113.03,104.33 0 bottom
E$165  [SMD0805]  118.75,91.69 90 top
E$166  [SMD0805]  103.12,62.8 90 top
E$167  [SMD0805]  107,54.61 90 top
E$168  [SMD0805]  24.19,110.05 270 bottom
E$169  [SMD0805]  52.07,110.05 270 bottom
E$170  [SMD0805]  80.01,110.05 270 bottom
E$171  [SMD0805]  74.68,105.41 0 bottom
E$172  [SMD0805]  46.8,105.41 0 bottom
E$173  [SMD0805]  18.86,105.41 0 bottom
E$174  [SMD0805]  103.12,80.64 0 bottom
E$175  [SMD0805]  103.12,74.3 0 bottom
E$176  [SMD0805]  103.12,67.94 0 bottom
E$177  [SMD0805]  122.05,97.16 0 bottom
E$178  [SMD0805]  139.13,106.68 180 top
E$179  [SMD0805]  154.5,106.68 180 top
E$180  [SMD0805]  156.15,71.06 0 bottom
E$181  [SMD0805]  156.15,60.96 0 bottom
E$182  [SMD0805]  156.15,50.8 0 bottom
E$183  [SMD0805]  148.59,71.12 0 bottom
E$184  [SMD0805]  148.59,60.96 0 bottom
E$185  [SMD0805]  148.59,50.8 0 bottom
E$186  [SMD0805]  98.93,7.68 0 bottom
E$187  [SMD0805]  95.82,7.68 0 bottom

## Library data of the parts
E$1-E$16 E$18-E$31 E$33-E$46 E$49 E$50 E$52-E$81 E$84-E$86 E$88 E$89 E$94-E$115 E$118 E$120-E$122 E$124-E$187 = rfa
E$17 E$82 E$83 E$87 E$90-E$93 E$117 E$119 E$123 = 74xx-us
E$32 = ubicom_v2
E$47 E$48 E$51 E$116 = maxim

## Nets
GND: E$1.P$2 E$3.P$3 E$4.P$3 E$5.P$2 E$6.P$2 E$7.P$2 E$8.P$3 E$8.P$10 E$9.P$3 E$9.P$10 E$10.P$3 E$10.P$7 E$10.P$14 E$12.P$1 E$13.P$2 E$13.P$5 E$14.P$2 E$14.P$5 E$15.P$2 E$15.P$5 E$16.P$2 E$16.P$5 E$18.P$1 E$18.P$2 E$18.P$7 E$18.P$8 E$19.P$2 E$20.P$2 E$21.P$2 E$22.P$1 E$23.P$1 E$23.P$2 E$24.P$2 E$25.P$2 E$26.P$2 E$31.P$1 E$46.P$3 E$55.P$2 E$56.P$2 E$65.P$1 E$67.P$2 E$67.P$4 E$71.P$2 E$72.P$2 E$86.P$1 E$118.P$2 E$118.P$4 E$141.P$2 E$165.P$2 E$178.P$2 E$179.P$2 E$181.P$2 E$182.P$2
S$1: E$46.P$9
S$3: E$22.P$6
S$4: E$65.P$6 E$68.P$2 E$69.P$1
S$5: E$22.P$2 E$30.P$1 E$31.P$2
S$6: E$70.P$4 E$73.P$1
S$7: E$73.P$2 E$74.P$2
S$10: E$70.P$3
S$11: E$29.P$6 E$36.P$1 E$37.P$1
S$12: E$46.P$8 E$54.P$2
S$14: E$44.P$1
S$15: E$50.P$2
S$16: E$85.P$1 E$86.P$2
S$17: E$72.P$1
S$18: E$58.P$1
S$19: E$167.P$1
S$20: E$55.P$1 E$56.P$1 E$57.P$1
S$22: E$121.P$2
S$29: E$120.P$1
S$33: E$18.P$6
S$35: E$42.P$1
S$36: E$18.P$5
S$38: E$18.P$4
S$39: E$18.P$3
S$49: E$15.P$1
S$53: E$46.P$4
S$54: E$46.P$5 E$52.P$2
S$66: E$13.P$6
S$69: E$14.P$1
S$70: E$14.P$6
S$71: E$16.P$1
S$72: E$16.P$6
S$78: E$49.P$2
S$80: E$60.P$2
S$90: E$132.P$1
S$98: E$163.P$1
S$108: E$136.P$1
S$110: E$5.P$1 E$135.P$1
S$112: E$7.P$1
S$118: E$140.P$1
S$121: E$11.7 E$138.P$1
S$122: E$11.6 E$138.P$2
S$123: E$139.P$1
S$128: E$140.P$2 E$141.P$1
S$135: E$145.P$1
S$139: E$63.P$1
S$141: E$62.P$1
S$142: E$144.P$1
S$143: E$143.P$1
S$144: E$67.P$3 E$67.P$5 E$118.P$3
S$145: E$9.P$4 E$151.P$1 E$152.P$1
S$146: E$11.4 E$146.P$2
S$147: E$11.5
S$148: E$153.P$2
S$149: E$154.P$2
S$151: E$153.P$1
S$154: E$9.P$9 E$151.P$2 E$152.P$2
S$156: E$154.P$1
S$158: E$10.P$13 E$12.P$3
S$159: E$10.P$8
S$160: E$10.P$10
S$161: E$155.P$1
S$162: E$9.P$1 E$150.P$1
S$163: E$156.P$2
S$164: E$156.P$1
S$165: E$157.P$2
S$166: E$157.P$1
S$167: E$9.P$8 E$150.P$2
S$168: E$9.P$7 E$149.P$2
S$169: E$9.P$2 E$149.P$1
S$170: E$8.P$4 E$148.P$1
S$171: E$8.P$9 E$148.P$2 E$155.P$2
S$172: E$8.P$8 E$147.P$2
S$173: E$8.P$1 E$147.P$1
S$174: E$8.P$7 E$84.P$2
S$175: E$8.P$2 E$84.P$1
S$176: E$10.P$20
S$177: E$10.P$11
S$178: E$10.P$1
S$183: E$118.P$1
S$185: E$10.P$12
S$186: E$10.P$18 E$161.P$1
S$188: E$10.P$2
S$189: E$10.P$9
S$190: E$10.P$19
S$195: E$165.P$1 E$167.P$2
S$197: E$158.P$1
S$201: E$166.P$1
S$202: E$163.P$2 E$164.P$1
S$203: E$11.2 E$164.P$2
S$211: E$2.P$1
S$212: E$3.P$1 E$169.P$2
S$213: E$4.P$1 E$170.P$2
SWOUT: E$28.P$2
V5: E$2.P$2 E$3.P$2 E$4.P$2 E$8.P$5 E$9.P$5 E$10.P$4 E$10.P$5 E$10.P$6 E$13.P$3 E$13.P$4 E$14.P$3 E$14.P$4 E$16.P$3 E$16.P$4 E$29.P$1 E$29.P$7 E$36.P$2 E$65.P$7 E$71.P$1 E$77.P$2 E$85.P$2 E$129.P$2 E$171.P$2 E$172.P$2 E$173.P$2 E$177.P$1 E$179.P$1 E$182.P$1 E$185.P$1
V6: E$24.P$1 E$25.P$1 E$26.P$1 E$29.P$4 E$30.P$2 E$34.P$1
V12: E$1.P$1 E$19.P$1 E$20.P$1 E$21.P$1 E$22.P$5 E$27.P$1 E$29.P$3 E$35.P$1
V25: E$42.P$2 E$65.P$3 E$68.P$1 E$76.P$1
V33: E$52.P$1 E$54.P$1 E$57.P$2 E$58.P$2 E$60.P$1 E$65.P$4 E$75.P$1

## Tracks (layer width: path | path; a pad name or v marks a point on that pad's centre or on a via)
GND  (via drill 0.7, 0.8)  (3 unrouted)
  Top 0.305: v136.53,36.64 135.32,36.64 | 133.99,29.4 v133.99,31.75 | E$165.P$2 v122.05,91.69 | 109.86,10.16 111.57,10.16 arc90 112.14,10.73 | 109.86,12.7 111.57,12.7 arc-90 112.14,12.13 | 121.92,56.58 121.92,58.99 arc-90 122.62,59.69 123.83,59.69 | 133.99,55.88 136.53,55.88 arc-90 137.16,55.24 v137.16,53.98
  Top 0.406: E$56.P$2 63.44,21.84 arc90 62.99,21.4 v62.99,20.57 62.99,19.68 arc90 63.37,19.3 E$55.P$2 | 74.61,50.99 72.77,50.99 arc50 71.94,50.61 arc17 v71.12,49.28 | 98.04,54.23 96.52,54.23 arc41 v94.49,53.47 | 97.79,54.99 96.39,54.99 arc-44 v94.49,55.75 | v72.39,54.55 arc17 72.83,53.72 arc53 73.47,53.4 74.61,53.4 | v78.3,50.93 arc-74 76.96,52.26 arc15 76.58,53.66 arc67 75.82,54.17 74.61,54.17 | v86.11,59.82 arc-56 85.15,61.59 85.15,63.37 | v84.33,59.82 84.33,63.37 | 74.61,55.82 v78.3,55.82 arc-59 80.2,54.74 arc-18 v81.28,52.07 | 84.33,45.85 v84.33,49.4 | v86.11,49.4 arc56 85.15,47.62 85.15,45.85 | 90.74,20.95 88.9,20.95 arc-53 v87.63,21.59 | 72.39,6.86 72.39,5.08 | 67.31,6.86 v67.31,9.14 | 63.5,4.95 63.5,6.86 | E$86.P$1 v40.13,64.52 | E$5.P$2 41.47,104.14 arc-73 v43.18,102.87 | E$6.P$2 69.41,104.14 arc-73 v71.12,102.87 | E$7.P$2 97.35,104.14 arc-70 v99.06,102.93 | 100.08,78.74 101.66,78.74 arc45 103.08,79.33 v103.12,79.38 | 100.01,72.39 101.66,72.39 arc45 103.08,72.98 v103.12,73.03 | 100.01,66.04 101.66,66.04 arc45 103.08,66.63 v103.12,66.67 | 64.77,83.25 64.77,81.85 arc90 65.6,81.03 v66.67,81.03 | 101.6,43.18 101.6,42.35 arc90 102.11,41.85 v104.97,41.85 | v101.35,8.89 103.57,8.89 | 112.14,12.13 v112.14,11.43 112.14,10.73 | 127.57,20.32 v124.46,20.32 124.46,15.81 arc90 125.03,15.24 127.57,15.24 | 127.57,10.16 v124.46,10.16 124.46,5.65 arc90 125.03,5.08 127.57,5.08 | 111.12,48.26 109.41,48.26 arc90 108.71,47.56 108.71,45.72 | 111.12,40.64 v108.71,40.64 108.71,43.18 | 108.71,43.18 108.71,45.72 | 108.71,45.72 111.25,45.72 | 108.71,43.18 111.19,43.18 | E$178.P$2 E$8.P$10 | E$179.P$2 E$9.P$10
  Top 0.406: v135.32,68.77 135.32,70.48
  Top 0.61: E$31.P$1 v5.59,82.8
  Top 0.813: 43.18,20.32 E$65.P$1
  Bottom 0.305: v127,34.29 128.91,34.29 | 136.46,34.29 arc90 136.53,34.35 v136.53,36.64 | E$141.P$2 v84.77,69.34 | 82.61,66.8 v84.77,66.8
  Bottom 0.406: v71.12,49.28 74.68,48.26 | v46.99,53.34 50.16,53.34 arc90 50.8,53.98 E$72.P$2 | 27.3,104.2 27.43,104.2 arc-45 28.84,103.62 v29.65,102.81 | E$3.P$3 55.5,104.14 arc-45 56.91,103.55 v57.53,102.93 | E$4.P$3 83.5,104.14 arc-45 84.91,103.55 85.6,102.87 | v122.05,93.79 122.05,95.82 | E$13.P$2 E$182.P$2 | E$14.P$2 E$181.P$2 | E$16.P$2 156.15,69.85 | 148.59,49.47 E$13.P$5 | E$14.P$5 148.53,59.75 148.59,59.75 | 148.59,69.79 E$16.P$5
  Bottom 0.813: 20.32,71.12 E$22.P$1 10.41,71.12
  Bottom 2.54: 22.1,91.44 E$1.P$2
  other vias: 20.07,12.19 22.61,12.19 25.65,25.65 31.5,29.21 7.11,25.65 38.35,43.94 40.89,43.94 44.7,43.94 47.24,43.94 51.05,43.94 53.59,43.94 49.53,34.29 53.34,32.77 68.64,11.68 74.61,64.64 85.09,52.07 72.39,5.02 63.5,5.02 33.02,20.32 33.02,12.7 33.02,5.08 43.18,5.08 53.34,5.08 53.34,12.7 53.34,20.32 20.32,5.08 25.4,91.44 33.02,91.44 25.4,78.74 33.02,78.74 33.02,71.12 20.32,62.67 33.02,63.5 64.77,52.07 18.86,106.68 46.8,106.68 74.68,106.68 85.53,102.87 52.01,89.41 109.86,23.18 112.59,19.05 133.29,20.32 133.35,10.16 120.33,50.8 104.39,62.8 123.76,59.69 95.82,6.41 98.93,6.41 125.09,79.18
  pour Bottom (isolate 0.406, no thermals): 18.29,94.23 18.29,2.54 35.56,2.54 35.56,94.23
  pour Top (isolate 0.406, no thermals): 30.48,23.88 55.88,23.88 55.88,2.54 30.48,2.54
  pour Route15 (isolate 0.406, no thermals): 2.54,104.14 7.62,104.14 10.16,106.68 10.16,111.76 154.94,111.76 154.94,106.68 157.48,104.14 162.56,104.14 162.56,10.16 157.48,10.16 154.94,7.62 154.94,2.54 10.16,2.54 10.16,7.62 7.62,10.16 2.54,10.16
RST  (via drill 0.7, 0.9)  (3 unrouted)
  Top 0.406: v74.61,46.04 74.61,48.58 | 61.02,14.22 v64.77,14.22 | 64.77,14.29 64.77,16.57 | 82.55,19.68 84.58,19.68
  Bottom 0.406: 74.61,19.68 74.61,14.92 arc-90 73.91,14.22 v64.77,14.22 | 74.61,19.68 v74.61,46.04 | 74.61,19.68 82.42,19.68
  other vias: 82.49,19.68
S$1
  Top 0.406: 79.57,45.91 79.57,32.45 arc-90 78.87,31.75 E$46.P$9
S$2  (via drill 0.8)
  other vias: 46.99,60.96
S$3
  Bottom 0.813: E$22.P$6 15.75,69.85 arc-90 16.51,69.09 16.51,64.26
S$4
  Top 0.813: E$65.P$6 E$68.P$2 E$69.P$1
S$5  (via drill 0.8)
  Top 0.61: E$30.P$1 5.59,73.66 | 5.59,73.66 E$31.P$2 | 5.59,73.66 v16.51,73.66
  Bottom 0.813: v16.51,73.66 E$22.P$2
S$6
  Top 0.406: E$70.P$4 E$73.P$1
S$7
  Top 0.406: 74.61,50.23 73.53,50.23 arc67 72.77,49.72 arc10 72.39,48.51 arc-32 72.01,47.82 arc-23 71.44,47.43 arc-22 70.8,47.31 69.47,47.31 arc-90 68.2,48.58 68.2,53.59 arc90 67.18,54.61 E$74.P$2 E$73.P$2
S$8  (via drill 0.8)
  other vias: 54.61,53.34
S$9  (via drill 0.8)
  other vias: 46.99,68.58
S$10  (via drill 0.9)
  Top 0.406: E$70.P$3 v60.96,59.69
S$11
  Top 0.61: E$29.P$6 18.54,26.67 arc-90 17.53,25.65 E$36.P$1 E$37.P$1
S$12
  Top 0.406: E$46.P$8 68.01,34.29 arc90 68.58,34.86 68.58,35.69 arc-90 69.15,36.26 78.11,36.26 arc90 78.74,36.89 78.74,45.72 78.8,45.72
  Bottom 0.406: E$46.P$8 E$54.P$2
S$13
  Bottom 0.406: 156.15,62.17 153.73,63.5
S$14  (via drill 0.8)
  Top 0.406: v71.12,51.82 74.61,51.82
  Bottom 0.406: v71.12,51.82 E$44.P$1 74.68,53.34 74.68,55.88
S$15
  Top 0.305: 80.39,45.85 E$50.P$2 84.52,18.41
S$16
  Top 0.406: E$85.P$1 E$86.P$2
S$17  (via drill 0.8)
  Top 0.61: v54.61,60.96 v54.61,68.58
  Bottom 0.406: v54.61,60.96 51.44,60.96 arc90 50.8,60.33 E$72.P$1
S$18  (via drill 0.7, 0.9)
  Top 0.305: v69.85,21.72 69.85,21.65
  Top 0.406: 86.74,45.91 86.74,41.85 arc-90 86.11,41.21 v84.77,41.21
  Route2 0.406: v84.77,41.21 77.53,41.21 arc90 76.71,40.39 76.71,22.54 arc-90 75.88,21.72 v69.85,21.72
  Bottom 0.406: v69.85,21.72 69.85,23.69 arc90 69.22,24.38 E$58.P$1
S$19
  Top 0.305: 98.04,52.58 100.58,52.58 arc45 102,53.16 102.86,54.02 arc-45 104.27,54.61 E$167.P$1
S$20
  Top 0.406: 67.31,16.45 E$55.P$1 E$56.P$1 E$57.P$1
S$21
  Top 0.406: 95.57,45.91 95.57,38.67 arc90 96.27,37.97 98.17,37.97
S$22
  Top 0.406: E$121.P$2 100.65,40.64
S$23
  Top 0.305: 132.02,94.11 arc90 132.08,94.04
S$25
  Top 0.406: 98.04,48.58 100.01,48.58 arc-90 100.65,47.94 100.65,45.78 arc90 100.71,45.72
S$26
  Top 0.406: 100.65,43.18 100.65,45.72
S$27
  Top 0.406: 97.98,49.4 101.92,49.4 arc-90 102.55,48.77 102.55,43.24
S$29
  Top 0.406: E$120.P$1 58.1,13.53 arc-90 58.8,14.22 60.9,14.22
S$33
  Top 0.406: 127.57,22.86 E$18.P$6
S$35  (via drill 0.8)
  Top 0.406: v74.61,62.1 74.61,60.58 77.34,60.58 arc-51 79.88,59.56 arc47 81.6,58.55 82.74,58.55 arc-60 v85.09,57.15
  Bottom 0.406: v85.09,57.15 E$42.P$1
S$36
  Top 0.406: 127.57,17.72 136.33,17.72 arc90 137.1,18.48 137.1,19.56 arc-90 137.86,20.32 E$18.P$5
S$38
  Top 0.406: 127.64,12.7 140.27,12.7 arc90 141.03,13.46 141.03,17.14 arc-90 141.67,17.78 E$18.P$4
S$39
  Top 0.406: 127.64,7.62 144.02,7.62 arc90 144.78,8.38 144.78,14.41 arc-90 145.61,15.24 E$18.P$3
S$42
  Top 0.305: 103.57,15.24 105.41,15.24 arc-90 107.7,12.95 107.7,7.87 arc90 108.46,7.11 112.65,7.11 arc90 113.47,7.94 113.47,9.4 arc-90 114.24,10.16 121.41,10.16
S$44
  Top 0.305: 121.35,20.32 115.82,20.32 arc90 114.94,19.43 114.94,14.8 arc-90 114.11,13.97 109.92,13.97
  Top 0.406: 109.92,13.97 arc90 109.86,13.91
S$45  (via drill 0.7)
  Top 0.305: 103.57,12.7 105.92,12.7 arc-90 106.68,11.94 106.68,6.67 arc90 107.5,5.84 113.92,5.84 arc90 114.75,6.67 114.75,8.06 arc-90 115.57,8.89 v116.84,8.89 121.28,8.89 | v116.84,19.05 121.35,19.05
  Bottom 0.305: v116.84,8.89 v116.84,19.05
S$46  (via drill 0.7)
  Top 0.305: 104.97,10.16 arc-90 105.73,9.4 105.73,5.46 arc90 106.62,4.57 115.19,4.57 arc90 116.01,5.4 116.01,6.79 arc-90 116.84,7.62 v118.87,7.62 121.35,7.62 | v118.87,17.78 121.35,17.78
  Top 0.406: 104.97,10.16 103.57,10.16
  Bottom 0.305: v118.87,7.62 v118.87,17.78
S$47
  Top 0.305: 130.75,36.51 130.75,43.5 arc-90 131.38,44.13 152.84,44.13 arc-90 153.67,43.31 153.67,38.16
S$49
  Top 0.305: 130.11,36.58 130.11,44.51 arc-90 130.81,45.21 154.88,45.21 arc-90 155.57,44.51 155.57,36.26 arc-90 154.88,35.56 E$15.P$1
S$50
  Top 0.305: 87.57,45.97 87.57,26.23 arc90 88.39,25.4 94.23,25.4 arc-90 95.25,24.38 95.25,12.45 arc90 96.27,11.43 103.57,11.43
S$51
  Top 0.305: 88.39,45.91 88.39,27.11 arc90 89.22,26.29 95.5,26.29 arc-90 96.52,25.27 96.52,14.92 arc90 97.47,13.97 103.57,13.97
S$52  (via drill 0.7)
  Top 0.305: 89.15,45.91 89.15,28.19 arc90 90.04,27.3 96.9,27.3 arc-90 97.79,26.42 97.79,17.4 arc90 98.68,16.51 v98.93,16.51 103.5,16.51
  Bottom 0.305: 98.93,8.83 v98.93,16.51
S$53
  Top 0.406: E$46.P$4 68.07,39.37 arc-90 68.64,38.8 68.64,38.04 arc90 69.22,37.47 77.41,37.47 arc90 77.98,38.04 77.98,45.72
  Bottom 0.406: E$46.P$4 67.37,39.37
S$54
  Top 0.406: E$46.P$5 68.01,41.91 arc90 68.64,42.55 68.64,43.37 arc-90 69.15,43.88 76.58,43.88 arc90 77.15,44.45 77.15,45.78
  Bottom 0.406: E$46.P$5 E$52.P$2
S$55  (via drill 0.7)
  Top 0.305: 109.86,15.24 108.27,15.24 arc-88 106.68,16.76 106.68,18.1 arc90 105.73,19.05 v100.08,19.05 99.95,19.05 arc-90 99.06,19.94 99.06,27.18 arc90 98.04,28.19 90.81,28.19 arc-90 89.98,29.02 89.98,45.66
  Bottom 0.305: v100.08,19.05 96.65,19.05 arc90 95.82,18.22 95.82,8.83
S$56
  Top 0.305: 133.35,29.53 133.35,27.56 arc90 134.11,26.8 143.95,26.8 arc90 144.78,27.62 144.78,37.27 arc-90 145.61,38.1 151.19,38.1
S$57
  Top 0.305: 132.72,29.59 132.72,26.48 arc90 133.48,25.72 145.86,25.72 arc90 146.56,26.42 146.56,34.8 arc-90 147.32,35.56 151.19,35.56
S$58
  Top 0.305: 132.08,29.53 132.08,26.35 arc-90 131.44,25.72 102.49,25.72 arc-90 101.6,26.61 101.6,29.59 arc90 100.71,30.48 92.46,30.48 arc-90 91.57,31.37 91.57,45.85
S$59
  Top 0.305: 81.15,45.85 81.15,21.53 arc90 81.72,20.95 84.52,20.95
S$60
  Top 0.305: 81.98,45.85 81.98,22.73 arc90 82.49,22.23 84.52,22.23
S$61
  Top 0.305: 130.75,29.53 130.75,27.56 arc-90 129.98,26.8 103.63,26.8 arc-90 102.87,27.56 102.87,30.61 arc90 102.11,31.37 93.09,31.37 arc-90 92.33,32.13 92.33,45.78
S$62
  Top 0.305: 130.11,29.53 130.11,28.45 arc-90 129.6,27.94 104.9,27.94 arc-90 104.14,28.7 104.14,31.5 arc90 103.38,32.26 93.92,32.26 arc-90 93.15,33.02 93.15,45.85
S$63
  Top 0.305: 90.55,22.16 90.55,23.05 arc90 90.04,23.56 83.31,23.56 arc-90 82.74,24.13 82.74,45.85
S$64
  Top 0.305: 93.98,45.85 93.98,33.85 arc90 94.68,33.15 124.14,33.15 arc90 124.97,33.97 124.97,38.73 arc-90 125.6,39.37 128.78,39.37 arc-90 129.48,38.67 129.48,36.64
S$65  (via drill 0.9)
  Top 0.406: 69.85,16.45 v69.85,19.18
S$66
  Top 0.305: 140.21,50.8 E$13.P$6 151.13,50.86
S$67
  Top 0.305: 79.57,63.44 arc90 79.63,63.37
S$68
  Top 0.305: 140.34,52.07 151.76,52.07 arc-66 153.73,50.8
S$69
  Top 0.305: 140.27,53.34 147.89,53.34 arc90 148.59,54.04 148.59,58.99 arc-90 149.29,59.69 151.76,59.69 arc67 E$14.P$1
S$70
  Top 0.305: 140.27,54.61 146.62,54.61 arc90 147.32,55.31 147.32,60.13 arc-90 148.15,60.96 E$14.P$6
S$71
  Top 0.305: 140.34,55.88 145.22,55.88 arc90 146.05,56.71 146.05,69.03 arc-90 146.88,69.85 151.76,69.85 arc67 E$16.P$1
S$72
  Top 0.305: 140.34,57.15 144.02,57.15 arc90 144.78,57.91 144.78,70.23 arc-90 145.61,71.12 E$16.P$6
S$73
  Top 0.305: 98.11,50.99 114.05,50.99 arc-90 114.94,50.1 114.94,47.75 arc90 115.7,46.99 117.41,46.99
S$74
  Top 0.305: 98.04,50.23 112.9,50.23 arc-90 113.67,49.47 113.67,45.28 arc90 114.49,44.45 117.41,44.45
S$75
  Top 0.305: 120.65,56.52 120.65,55.12 arc90 121.03,54.74 121.54,54.74 arc90 121.92,55.12 121.92,56.52
S$77
  Top 0.305: 94.74,45.85 94.74,36.07 arc90 95.63,35.18 113.41,35.18 arc90 114.3,36.07 114.3,41.08 arc-90 115.13,41.91 117.35,41.91
S$78  (via drill 0.8)
  Top 0.406: 71.18,6.79 v71.18,9.14
  Bottom 0.406: v71.18,9.14 E$49.P$2
S$80
  Top 0.406: E$60.P$2 60.9,11.68
S$81
  Top 0.305: 63.5,16.51 63.5,16.57
S$83
  Top 0.305: 125.73,56.52 125.73,54.17 arc90 126.56,53.34 133.99,53.34
S$84
  Top 0.305: 133.99,57.15 132.52,57.15 arc90 132.14,56.77 132.14,56.26 arc90 132.52,55.88 133.92,55.88 arc-90 133.99,55.82
S$85
  Top 0.305: 124.46,56.52 124.46,44.13 arc-90 123.51,43.18 117.47,43.18
S$86
  Top 0.305: 105.03,23.18 107.38,23.18
S$87  (via drill 0.7)
  Top 0.305: v132.21,54.61 134.05,54.61 | 123.19,56.58 v123.19,52.32 123.19,46.61 arc-90 122.3,45.72 117.54,45.72 arc-90 117.47,45.78
  Bottom 0.305: v132.21,54.61 129.35,54.61 arc90 128.65,53.91 128.65,53.02 arc-90 127.95,52.32 v123.19,52.32
S$88  (via drill 0.7)
  Top 0.305: v127,54.61 127,56.52 | 134.05,50.8 v127,50.8 126.62,50.8 arc90 125.73,49.91 125.73,41.66 arc-90 124.71,40.64 117.47,40.64
  Route2 0.305: v127,50.8 v127,54.61
S$90
  Top 0.305: 90.74,45.91 90.74,30.16 arc90 91.5,29.4 99.44,29.4 arc-90 100.27,28.57 100.27,24 arc90 101.09,23.18 E$132.P$1
S$96  (via drill 0.9)
  Top 0.305: v55.88,74.93 55.88,71.94 arc90 56.71,71.12 79.57,71.12 arc-90 80.33,70.36 80.33,63.5
S$97  (via drill 0.9)
  Top 0.305: v60.96,77.47 60.96,83.25
S$98  (via drill 4.32)  (1 unrouted)
  Bottom 0.406: 113.03,112.08 E$163.P$1
  Bottom 1.016: 105.22,103.63 arc-90 103.25,105.6 103.25,110.3 arc-90 105.03,112.08 113.03,112.08 122.75,112.08 | 122.75,112.08 155.07,112.08 arc-59 160.02,109.28 | 120.97,103.63 arc90 122.75,105.41 122.75,112.08
  other vias: 160.02,109.22
S$102  (via drill 0.9)
  Top 0.305: 63.5,83.25 63.5,80.71 arc90 64.2,80.01 65.22,80.01 arc-90 66.04,79.18 v66.04,77.47
S$103
  Top 0.406: 62.23,89.47 62.23,93.03 arc90 61.59,93.66 61.02,93.66 arc-90 60.33,94.36 60.33,96.52
S$105  (via drill 0.9)
  Top 0.305: 58.42,83.19 58.42,80.83 arc-90 57.66,80.07 56.71,80.07 arc90 55.88,79.25 v55.88,77.47
S$107
  Top 0.406: 59.69,89.53 59.69,91.25 arc90 58.93,92.01 53.34,92.01 arc-90 52.64,92.71 52.64,93.28 arc90 51.94,93.98 47.82,93.98
S$108
  Top 0.406: 64.71,89.53 64.71,93.15 arc-90 65.53,93.98 E$136.P$1
S$110
  Top 0.406: E$5.P$1 35.81,104.14 arc90 34.99,103.31 34.99,94.74 arc90 35.75,93.98 E$135.P$1
S$111
  Top 0.406: 60.33,98.87 60.33,103.31 arc-90 61.15,104.14 66.1,104.14
S$112
  Top 0.406: 75.44,93.92 87.95,93.92 arc90 88.9,94.87 88.9,103.19 arc-90 89.85,104.14 E$7.P$1
S$113
  Top 0.305: 81.98,63.37 81.98,72.9 arc90 81.22,73.66 71.88,73.66 arc-90 71.12,74.42 71.12,84.52 arc90 70.29,85.34 59.18,85.34 arc-90 58.42,86.11 58.42,89.53
S$117
  Top 0.305: 60.96,89.47 60.96,87.19 arc90 61.78,86.36 71.5,86.36 arc-90 72.39,85.47 72.39,75.69 arc90 73.15,74.93 81.98,74.93 arc-90 82.74,74.17 82.74,63.5
S$118  (via drill 0.7, 0.8)  (2 unrouted)
  Top 0.305: v63.5,69.34 E$140.P$1 | 140.34,49.53 142.75,49.53 arc-90 143.51,48.77 v143.51,46.93
  Route2 0.305: 63.5,69.22 63.5,56.83 arc90 64.45,55.88 65.72,55.88 arc-90 66.67,54.93 66.67,44.45 arc90 67.63,43.5 142.56,43.5 arc90 143.51,44.45 143.51,46.99
S$120  (via drill 0.9)
  Top 0.305: 81.15,63.44 81.15,71.63 arc90 80.39,72.39 61.66,72.39 arc-90 60.96,73.09 v60.96,74.93
S$121  (via drill 0.8)  (1 unrouted)
  Top 0.305: v68.58,60.96 68.58,61.72 arc-90 69.09,62.23 71.75,62.23 arc-90 72.52,61.66 72.52,58.8 arc90 73.15,58.17 74.68,58.17
  Bottom 0.305: 68.58,61.02 68.58,65.21 arc-45 69.17,66.63 94.66,92.12 arc-45 96.08,92.71 E$138.P$1 108.84,92.71 arc90 109.86,93.73 E$11.7
S$122  (via drill 0.8)
  Top 0.305: v71.12,60.96 71.12,58.04 arc90 71.75,57.4 74.68,57.4
  Bottom 0.305: v71.12,60.96 71.12,64.39 arc-45 71.71,65.8 95.49,89.58 arc-45 96.9,90.17 E$138.P$2 110.11,90.17 arc90 111.12,91.19 E$11.6
S$123  (via drill 0.7, 0.8)  (1 unrouted)
  Top 0.305: v66.04,66.8 E$139.P$1 | 128.27,62.8 128.27,64.14 arc-90 128.78,64.64 130.3,64.64 arc-90 130.81,64.14 v130.81,62.23
  Route2 0.305: 66.04,66.67 66.04,58.74 arc90 66.99,57.78 67.63,57.78 arc-90 68.58,56.83 68.58,45.72 arc90 69.53,44.77 129.54,44.77 arc90 130.81,46.04 v130.81,62.23
S$124
  Top 0.305: 100.08,67.31 96.27,67.31 arc90 95.57,66.61 95.57,63.56 arc-90 95.5,63.5
S$125
  Top 0.305: 99.95,68.58 95.5,68.58 arc90 94.81,67.88 94.81,63.5
S$128  (via drill 0.8)
  Top 0.305: 79.57,63.37 79.57,68.71 arc90 78.93,69.34 v77.79,69.34 E$140.P$2
  Bottom 0.305: v77.79,69.34 E$141.P$1
S$129  (via drill 0.8)
  Top 0.305: 78.74,63.37 78.74,66.17 arc90 78.11,66.8 v77.22,66.8 72.14,66.8
  Bottom 0.305: v77.22,66.8 80.07,66.8
S$130
  Top 0.305: 93.98,63.44 93.98,69.72 arc-45 94.57,71.13 96.51,73.07 arc-45 97.92,73.66 100.01,73.66
S$131
  Top 0.305: 92.33,63.44 92.33,71.56 arc-45 92.92,72.98 94.28,74.34 arc-45 95.7,74.93 100.01,74.93
S$132
  Top 0.305: 90.74,63.37 90.74,73.59 arc-45 91.33,75.01 95.74,79.42 arc-45 97.16,80.01 100.01,80.01
S$133
  Top 0.305: 89.98,63.37 89.98,74.93 arc-45 90.56,76.34 94.92,80.69 arc-45 96.33,81.28 100.01,81.28
S$134
  Top 0.305: 89.15,63.37 89.15,77.47 arc-45 89.74,78.88 95.36,84.5 arc-45 96.78,85.09 101.92,85.09
S$135
  Top 0.305: 88.33,63.31 88.33,78.86 arc-45 88.91,80.28 95.68,87.04 arc-45 97.09,87.63 E$145.P$1
S$136  (via drill 0.8)
  Top 0.305: v133.99,34.29 133.99,36.64
S$137  (via drill 0.8)
  Top 0.305: v131.38,34.29 131.38,36.7
S$138
  Top 0.305: 133.41,36.64 133.41,38.04 arc-90 133.86,38.48 134.49,38.48 arc90 134.94,38.99 134.94,41.78 arc-90 135.45,42.29 136.72,42.29 arc-90 136.78,42.23
S$139
  Top 0.305: 134.68,36.64 134.68,37.53 arc-90 135.06,37.91 136.33,37.91 arc90 136.78,38.35 E$63.P$1
S$140
  Top 0.305: 132.72,36.64 132.72,39.81
S$141
  Top 0.305: 132.08,36.64 132.08,37.91 arc44 131.83,38.54 arc-53 131.57,39.37 131.57,41.97 arc-90 131.95,42.35 E$62.P$1
S$142
  Top 0.305: 87.57,63.44 87.57,80.39 arc-45 88.15,81.8 95.93,89.58 arc-45 97.35,90.17 E$144.P$1
S$143
  Top 0.305: 86.74,63.44 86.74,81.78 arc-45 87.33,83.2 96.25,92.12 arc-45 97.67,92.71 E$143.P$1
S$144
  Top 0.305: E$118.P$3 142.88,62.23 arc90 143.51,62.87 143.51,71.75 arc-90 144.15,72.39 147.96,72.39 arc90 148.59,73.03 148.59,78.74 arc-90 149.22,79.38 151.13,79.38 | 151.13,79.38 160.66,79.38 arc90 161.29,80.01 E$67.P$5 | 151.13,79.38 E$67.P$3
S$145
  Top 0.305: 106.24,67.31 108.52,67.31 arc45 109.93,67.9 124,81.96 arc-45 125.42,82.55 139.82,82.55 arc45 141.24,83.14 149.27,91.17 arc45 149.86,92.59 E$152.P$1 E$151.P$1 E$9.P$4
S$146
  Top 0.305: E$146.P$2 107.25,85.09 arc90 107.95,85.79 107.95,87.63 | 107.95,87.63 104.33,87.63 | 107.95,87.63 109.28,87.63 arc45 110.69,88.22 113.08,90.6 arc45 113.67,92.01 E$11.4
S$147
  Top 0.305: 104.33,92.71 107,92.71 arc-90 107.89,91.82 107.89,90.17 | 104.33,90.17 107.89,90.17 | 107.89,90.17 109.28,90.17 arc45 110.69,90.76 111.81,91.87 arc45 112.39,93.28 E$11.5
S$148
  Top 0.305: E$153.P$2 147.32,92.52 arc-45 146.73,91.11 139.4,83.77 arc-45 137.98,83.19 125.1,83.19 arc45 123.68,82.6 110.25,69.17 arc-45 108.84,68.58 106.17,68.58
S$149
  Top 0.305: 106.24,72.39 108.27,72.39 arc45 109.68,72.98 120.57,83.87 arc-45 121.99,84.45 134.24,84.45 arc45 135.65,85.04 141.65,91.05 arc45 142.24,92.46 E$154.P$2
S$151
  Top 0.305: 144.78,96.46 E$153.P$1 144.78,92.52 arc-45 144.19,91.11 137.49,84.41 arc-45 136.08,83.82 124.78,83.82 arc45 123.37,83.23 110.57,70.44 arc-45 109.15,69.85 106.24,69.85
S$152
  Top 0.305: 127,62.87 127,65.34 arc-90 127.7,66.04 141.6,66.04 arc90 142.24,66.67 142.24,72.96 arc-90 142.94,73.66 146.56,73.66 arc90 147.32,74.42 147.32,82.93 arc-45 147.91,84.34 149.34,85.77 arc-45 150.75,86.36 153.99,86.36 arc-90 154.94,85.41 154.94,81.22
S$153
  Top 0.305: 139.76,96.52 139.76,94.11 arc-90 139.7,94.04
S$154
  Top 0.305: E$9.P$9 arc-90 151.13,106.68 151.13,104.78 arc90 151.76,104.14 arc-90 152.4,103.5 E$151.P$2 E$152.P$2 152.4,92.52 arc-45 151.81,91.11 143.21,82.5 arc-45 141.79,81.92 125.73,81.92 arc45 124.32,81.33 109.61,66.63 arc-45 108.2,66.04 106.3,66.04
S$155
  Top 0.305: 134.68,93.98 134.68,96.52
S$156
  Top 0.305: E$154.P$1 139.7,92.59 arc-45 139.11,91.17 133.62,85.68 arc-45 132.2,85.09 121.67,85.09 arc45 120.25,84.5 110,74.25 arc-45 108.58,73.66 106.24,73.66
S$158
  Bottom 0.406: E$10.P$13 arc-90 147.32,101.6 159,101.6 arc-90 160.02,100.46 E$12.P$3
S$159  (via drill 0.7)  (1 unrouted)
  Top 0.305: 120.65,62.87 v120.65,64.58
  Route2 0.305: 120.65,64.77 120.65,69.66 arc45 120.06,71.07 118.7,72.44 arc-45 118.11,73.85 118.11,86.27 arc-90 120.11,88.27 130.81,88.27 arc90 132.08,89.53 132.08,100.97 arc-67 E$10.P$8
S$160  (via drill 0.7)  (1 unrouted)
  Top 0.305: 123.19,62.8 v123.19,64.58
  Route2 0.305: 123.19,64.77 123.19,70.93 arc45 122.6,72.34 121.24,73.71 arc-45 120.65,75.12 120.65,83.72 arc-90 122.65,85.72 138.43,85.72 arc90 139.7,87 139.7,100.97 arc67 E$10.P$10
S$161
  Top 0.305: E$155.P$1 134.62,92.59 arc-45 134.03,91.17 129.81,86.95 arc-45 128.39,86.36 121.03,86.36 arc45 119.62,85.77 110.63,76.79 arc-45 109.22,76.2 106.24,76.2
S$162
  Top 0.305: E$9.P$1 146.69,105.41 arc90 146.05,104.78 arc-90 145.41,104.14 arc90 144.78,103.5 E$150.P$1
S$163
  Top 0.305: 106.24,78.74 108.27,78.74 arc45 109.68,79.33 116.76,86.41 arc-45 118.18,87 126.62,87 arc45 128.03,87.58 131.49,91.05 arc45 132.08,92.46 E$156.P$2
S$164
  Top 0.305: E$156.P$1 129.54,92.52 arc-45 128.95,91.11 126.06,88.22 arc-45 124.65,87.63 117.86,87.63 arc45 116.44,87.04 110,80.6 arc-45 108.58,80.01 106.24,80.01
S$165
  Top 0.305: E$157.P$2 127,92.59 arc-45 126.41,91.17 124.09,88.85 arc-45 122.68,88.27 117.54,88.27 arc45 116.13,87.68 110.31,81.87 arc-45 108.9,81.28 106.24,81.28
S$166
  Top 0.305: E$157.P$1 124.46,92.59 arc-45 123.87,91.17 122.19,89.49 arc-45 120.77,88.9 117.22,88.9 arc45 115.81,88.31 110.63,83.14 arc-45 109.22,82.55 105.86,82.55
S$167
  Top 0.305: E$9.P$8 arc-90 148.59,106.68 148.59,104.78 arc-90 147.96,104.14 arc90 147.32,103.5 E$150.P$2 147.32,94.04 arc90 147.38,93.98
S$168
  Top 0.305: E$9.P$7 arc90 143.51,106.68 143.51,104.78 arc-90 142.88,104.14 arc90 142.24,103.5 E$149.P$2 142.24,94.04 arc-90 142.18,93.98
S$169
  Top 0.305: E$9.P$2 144.78,106.05 arc-90 145.41,106.68 arc90 146.05,107.31 146.05,108.58 arc90 145.41,109.22 141.6,109.22 arc90 140.97,108.58 140.97,104.78 arc-90 140.34,104.14 arc90 139.7,103.5 E$149.P$1
S$170
  Top 0.305: E$148.P$1 E$8.P$4
S$171
  Top 0.305: E$8.P$9 arc-90 135.89,106.68 135.89,104.78 arc90 136.53,104.14 arc-90 137.16,103.5 E$148.P$2 E$155.P$2 137.16,92.59 arc-45 136.57,91.17 131.71,86.31 arc-45 130.3,85.72 121.35,85.72 arc45 119.94,85.14 110.31,75.52 arc-45 108.9,74.93 106.24,74.93
S$172
  Top 0.305: E$8.P$8 arc-90 133.35,106.68 133.35,104.78 arc-90 132.72,104.14 arc90 132.08,103.5 E$147.P$2 132.08,94.04 arc-90 132.02,93.98
S$173
  Top 0.305: E$8.P$1 131.44,105.41 arc90 130.81,104.78 arc-90 130.18,104.14 arc90 129.54,103.5 E$147.P$1 129.54,94.04 arc90 129.6,93.98
S$174
  Top 0.305: E$8.P$7 arc90 128.27,106.68 128.27,104.78 arc-90 127.64,104.14 arc90 127,103.5 E$84.P$2 127,94.04 arc-90 126.94,93.98
S$175
  Top 0.305: E$8.P$2 129.54,106.05 arc-90 130.18,106.68 arc90 130.81,107.31 130.81,108.58 arc90 130.18,109.22 126.36,109.22 arc90 125.73,108.58 125.73,104.78 arc-90 125.09,104.14 arc90 124.46,103.5 E$84.P$1 124.46,94.04 arc-90 124.4,93.98
S$176  (via drill 0.7)  (1 unrouted)
  Top 0.305: 125.73,62.8 v125.73,64.58
  Route2 0.305: 125.73,64.77 125.73,72.2 arc45 125.14,73.61 123.78,74.98 arc-45 123.19,76.39 123.19,81.92 arc-90 124.46,83.19 140.97,83.19 arc90 142.24,84.45 142.24,100.97 arc67 E$10.P$20
S$177  (via drill 0.7)  (1 unrouted)
  Top 0.305: 124.46,62.8 v124.46,65.47
  Route2 0.305: 124.46,65.41 124.46,71.56 arc45 123.87,72.98 122.51,74.34 arc-45 121.92,75.76 121.92,82.45 arc-90 123.92,84.45 139.7,84.45 arc90 140.97,85.72 E$10.P$11
S$178  (via drill 0.7)  (1 unrouted)
  Top 0.305: 121.92,62.8 v121.92,65.47
  Route2 0.305: 121.92,65.41 121.92,70.29 arc45 121.33,71.71 119.97,73.07 arc-45 119.38,74.49 119.38,85 arc-90 121.38,87 137.16,87 arc90 138.43,88.27 E$10.P$1
S$182
  Top 0.305: 134.05,70.55 134.05,71.88 arc-90 134.56,72.39 139.83,72.39 arc-90 140.34,71.88 140.34,70.04
S$183  (via drill 0.8)  (1 unrouted)
  Bottom 0.305: E$118.P$1 133.35,63.94 arc-90 134.05,64.64 139.76,64.64 arc90 140.34,65.22 140.34,67.63
  other vias: 140.34,67.56
S$184
  Top 0.406: 127.7,76.77 127.7,79.18
S$185  (via drill 0.7)
  Top 0.305: 131.51,70.55 131.51,72.45 arc-90 132.08,73.03 137.29,73.03 arc90 137.79,73.53 v137.79,74.93
  Bottom 0.305: E$10.P$12 143.51,86.36 arc-90 142.88,85.72 138.43,85.72 arc90 137.79,85.09 v137.79,74.93
S$186  (via drill 0.7)
  Top 0.305: 134.05,76.83 134.05,78.42 arc-90 134.87,79.25 E$161.P$1
  Bottom 0.305: E$10.P$18 arc90 144.78,101.6 144.78,83.82 arc-90 144.15,83.19 140.4,83.19 arc90 139.76,82.55 E$161.P$1
  other vias: 139.76,79.25
S$188  (via drill 0.7)
  Top 0.305: v127.7,68.83 127.7,70.48
  Bottom 0.305: E$10.P$2 135.89,94.11 arc-90 135.06,93.28 127.13,93.28 arc90 126.36,92.52 126.36,69.34 arc90 126.87,68.83 v127.7,68.83
S$189  (via drill 0.7)
  Top 0.305: 130.24,76.83 v130.24,79.18
  Bottom 0.305: E$10.P$9 arc-90 137.16,101.6 137.16,91.38 arc-90 136.59,90.81 130.87,90.81 arc90 130.24,90.17 v130.24,79.18
S$190  (via drill 0.7)
  Top 0.305: 131.51,76.77 131.51,80.07 arc-90 132.08,80.64 v133.35,80.64
  Bottom 0.305: E$10.P$19 arc90 142.24,101.6 142.24,88.9 arc-90 141.6,88.27 133.99,88.27 arc90 133.35,87.63 v133.35,80.64
S$191  (via drill 0.7, 0.8)  (1 unrouted)
  Top 0.305: v130.24,68.83 130.24,70.55
  Bottom 0.305: v130.24,68.83 130.24,72.01 arc-90 130.94,72.71 139.57,72.71 arc90 140.21,73.34 140.21,75.88
  other vias: 140.21,75.82
S$195  (via drill 0.7, 0.8)  (1 unrouted)
  Top 0.305: v115.38,91.69 E$165.P$1 | E$167.P$2 v110.43,54.61
  Bottom 0.305: v115.38,91.69 113.67,91.69 arc90 112.9,90.93 112.9,55.24 arc-90 112.27,54.61 110.49,54.61
S$196
  Top 0.305: 128.97,70.55 128.97,71.82 arc90 128.4,72.39 125.42,72.39 arc45 124,71.8 110.19,57.99 arc-45 108.77,57.4 98.04,57.4
S$197
  Top 0.305: 132.78,67.56 E$158.P$1 | 132.78,67.56 121.61,67.56 arc45 120.32,66.98 110.5,57.16 arc-45 108.96,56.58 98.04,56.58 | 132.78,67.56 132.78,70.48
S$198
  Top 0.305: 130.18,70.55 130.18,72.39 arc90 129.54,73.03 124.91,73.03 arc45 123.49,72.44 109.81,58.75 arc-45 108.39,58.17 98.04,58.17
S$199
  Top 0.305: 135.32,76.77 135.32,74.36 arc-90 134.62,73.66 124.46,73.66 arc45 123.05,73.07 109.55,59.58 arc-45 108.14,58.99 98.04,58.99
S$200
  Top 0.305: 132.78,76.77 132.78,74.99 arc-90 132.08,74.3 124.02,74.3 arc45 122.6,73.71 109.3,60.4 arc-45 107.88,59.82 98.11,59.82
S$201
  Top 0.305: 128.97,76.77 128.97,75.56 arc-90 128.33,74.93 123.57,74.93 arc45 122.16,74.34 108.98,61.16 arc-45 107.57,60.58 101.85,60.58 | 98.11,60.58 101.85,60.58 | 101.85,60.58 E$166.P$1
S$202
  Bottom 0.406: E$164.P$1 E$163.P$2
S$203
  Bottom 0.305: E$11.2 116.2,102.36 arc90 115.51,103.06 E$164.P$2
S$205  (via drill 0.8)
  Top 0.305: 98.11,51.82 110.11,51.82 arc45 111.52,52.4 v112.01,52.9
S$211  (via drill 0.9)
  Top 0.305: 57.15,83.25 57.15,81.72 arc-90 56.45,81.03 54.1,81.03 arc90 53.34,80.26 v53.34,74.93
  Route2 0.305: E$2.P$1 25.4,102.87 arc90 26.04,102.23 27.3,102.23 arc-90 27.94,101.6 arc90 28.57,100.97 32.38,100.97 arc-90 33.02,100.33 33.02,95.89 arc90 33.66,95.25 41.27,95.25 arc-90 41.91,94.61 41.91,75.56 arc90 42.55,74.93 v53.34,74.93
  Bottom 0.406: E$2.P$1 25.4,110.05
S$212  (via drill 0.9)
  Top 0.305: 59.63,83.25 59.63,80.01 arc-46 59.12,78.8 arc45 58.42,77.15 v58.42,74.93
  Route2 0.305: E$3.P$1 53.34,102.87 arc-90 52.7,102.23 49.53,102.23 arc90 48.9,101.6 48.9,80.64 arc90 49.53,80.01 57.78,80.01 arc-90 58.42,79.38 v58.42,74.93
  Bottom 0.406: E$3.P$1 E$169.P$2
S$213  (via drill 0.9)
  Top 0.305: 62.23,83.25 62.23,80.01 arc46 62.74,78.8 arc-36 63.5,77.34 v63.5,74.93
  Route2 0.305: E$4.P$1 81.28,102.87 arc-90 80.64,102.23 77.47,102.23 arc90 76.83,101.6 76.83,92.71 arc-90 76.2,92.08 64.14,92.08 arc90 63.5,91.44 v63.5,74.93
  Bottom 0.406: E$4.P$1 E$170.P$2
S$220  (via drill 0.7)  (1 unrouted)
  Top 0.305: 91.57,63.37 91.57,72.64 arc-45 92.15,74.06 v93.03,74.93 | 63.5,89.47 63.5,88.2 arc90 64.14,87.57 v66.86,87.57
  Route2 0.305: v93.03,74.93 93.03,78.04 arc45 92.44,79.45 84.91,86.98 arc45 83.5,87.57 66.8,87.57
S$221  (via drill 0.7, 0.9)  (2 unrouted)
  Top 0.305: v94.74,73.09 93.74,72.09 arc45 93.15,70.67 93.15,63.44
  Route2 0.305: 94.81,73.09 66.74,73.09 arc-90 66.1,73.72 66.1,74.93
  other vias: 66.04,74.93
SWOUT
  Bottom 0.813: 13.46,64.26 13.46,67.31
  pour Bottom (isolate 0.406, no thermals): 13.97,65.79 13.97,62.23 16.51,62.23 16.51,41.91 2.54,41.91 2.54,65.79
V5  (via drill 0.8, 0.9)  (1 unrouted)
  Top 0.305: 109.79,16.51 112.52,16.51 arc90 112.58,16.57 | 134.05,49.53 136.53,49.53 arc90 137.16,50.16 v137.16,51.44 | v126.3,59.69 127.64,59.69 arc-90 128.27,59.05 128.27,56.58
  Top 0.406: 40.13,47.75 E$85.P$2 | 100.01,82.55 101.66,82.55 arc-45 103.08,81.96 v103.12,81.92 | 100.01,76.2 101.66,76.2 arc-45 103.08,75.61 v103.12,75.56 | 100.01,69.85 101.66,69.85 arc-45 103.08,69.26 v103.12,69.22 | v54.55,89.41 57.15,89.41 | 121.35,22.86 v124.46,22.86 | 121.35,12.7 v124.46,12.7 | 127.57,21.59 130.24,21.59 arc-90 130.75,21.08 v130.75,20.32 130.75,19.56 arc-90 130.24,19.05 126.05,19.05 arc90 125.48,18.48 125.48,17.02 arc90 125.98,16.51 127.57,16.51 | 127.57,11.43 130.3,11.43 arc-90 130.81,10.92 v130.81,10.16 130.81,9.4 arc-90 130.3,8.89 125.98,8.89 arc90 125.48,8.38 125.48,6.86 arc90 125.98,6.35 127.51,6.35 | 117.47,48.26 E$129.P$2 | E$179.P$1 E$9.P$5 | E$8.P$5 139.06,105.41
  Top 0.61: E$36.P$2 E$29.P$7
  Top 0.813: E$29.P$7 16.76,35.56 | E$29.P$1 20.32,35.56 | v53.59,37.85 E$77.P$2
  Top 1.016: 30.48,47.75 40.13,47.75 55.12,47.75 arc-90 56.39,46.48 56.39,37.85 56.39,27.94 arc-90 55.12,26.67 53.34,26.67 | E$65.P$7 53.34,26.67 | 53.34,26.67 E$71.P$1
  Top 1.27: 56.39,37.85 v53.59,37.85
  Bottom 0.406: E$173.P$2 E$2.P$2 | E$172.P$2 E$3.P$2 | E$171.P$2 E$4.P$2 | E$10.P$4 E$10.P$5 126.81,100.33 arc-90 126.24,100.9 126.24,101.66 | 126.24,101.66 126.24,102.42 arc-90 126.75,102.93 128.21,102.93 arc-90 E$10.P$6 | E$177.P$1 122.05,100.71 arc-90 122.94,101.6 arc-90 123,101.66 126.24,101.66 | E$182.P$1 E$13.P$3 | E$16.P$3 156.15,72.2 | E$185.P$1 E$13.P$4 | 148.59,62.17 E$14.P$4 | 148.53,72.26 E$16.P$4
  other vias: 51.05,37.85 60.96,62.23 18.86,104.14 22.92,110.05 46.8,104.14 50.8,110.05 74.68,104.14 78.74,110.05 112.59,16.51 120.33,48.26 127.64,79.12 142.3,79.25 142.75,75.88 137.6,70.1
  pour Top (isolate 0.406, no thermals): 5.08,33.02 35.56,33.02 35.56,60.96 5.08,60.96
  pour Route14 (isolate 0.406, rank 2, no thermals): 10.16,111.76 154.94,111.76 154.94,106.68 157.48,104.14 162.56,104.14 162.56,10.16 157.48,10.16 154.94,7.62 154.94,2.54 10.16,2.54 10.16,7.62 7.62,10.16 2.54,10.16 2.54,104.14 7.62,104.14 10.16,106.68
V6  (via drill 0.8)
  Top 0.61: v5.59,64.52 E$30.P$2
  Top 1.016: v8.89,13.97 12.95,13.97 arc-90 13.97,12.95 13.97,9.65 arc90 14.99,8.64 26.92,8.64 arc90 27.94,9.65 E$34.P$1 E$29.P$4
  Route2 0.61: v8.89,13.97 26.67,13.97 arc90 27.94,15.24 27.94,63.5 arc90 26.92,64.52 v5.59,64.52
  pour Bottom (isolate 0.406, no thermals): 2.54,40.64 16.51,40.64 16.51,10.92 2.54,10.92
V12  (via drill 0.8)
  Top 0.813: E$29.P$3 E$35.P$1 22.1,20.32 3.56,20.32 arc-90 2.54,21.34 2.54,85.6 arc-90 3.56,86.61 v5.59,86.61
  Bottom 0.813: 10.41,68.58 E$22.P$5
  Bottom 2.54: 11.94,91.44 E$1.P$1
  pour Bottom (isolate 0.406, no thermals): 16.51,94.23 16.51,76.45 11.68,76.45 11.68,73.91 8.13,73.91 8.13,69.34 11.94,69.34 11.94,66.8 2.54,66.8 2.54,94.23
V25  (via drill 0.8, 0.9)  (1 unrouted)
  Top 0.406: 98.04,53.4 96.84,53.4 arc64 96.33,53.09 arc8 95.82,51.82 arc-77 v94.49,50.93 | 83.57,63.31 83.57,62.1 arc-62 83,61.15 arc40 v81.79,59.82 | 83.57,45.85 83.57,47.18 arc74 82.8,48.2 arc-67 v81.79,49.4 | v81.28,57.15 arc44 79.12,58.42 arc26 v78.3,58.36 arc45 76.83,57.15 arc-62 75.88,56.58 74.61,56.58 | v78.3,53.47 arc74 76.26,54.99 74.61,54.99
  Top 0.813: E$76.P$1 45.97,34.8 arc-90 44.96,33.78 42.42,33.78 arc90 41.4,32.77 E$68.P$1 E$65.P$3
  Route14 0.813: 91.44,52.13 91.44,47.12 arc-90 90.17,45.85 81.41,45.85 arc90 80.14,44.58 80.14,29.84 arc-90 78.93,28.64 47.31,28.64 arc-90 45.97,29.97 arc1 E$76.P$1
  Bottom 0.406: E$42.P$2 v92.46,57.15 | 74.68,58.42 78.36,58.42
  other vias: 91.44,52.07 45.97,37.85
  pour Route14 (isolate 0.406, no thermals): 76.2,61.85 96.58,61.85 96.58,47.43 76.2,47.43
V33  (via drill 0.8, 0.9)  (2 unrouted)
  Top 0.305: 131.38,29.4 v131.38,31.75 | 134.68,29.4 134.68,28.26 arc90 135,27.94 136.08,27.94 arc90 136.53,28.38 v136.53,29.4 135.32,29.4
  Top 0.406: 90.81,18.41 88.9,18.41 arc-53 v87.63,19.05 arc-53 88.9,19.68 90.74,19.68 | v62.99,24.38 E$57.P$2 | 72.45,16.76 v72.45,18.35 | 66.04,6.79 66.04,8.26 arc59 65.79,8.7 arc14 v64.77,9.14 64.77,6.92 | E$60.P$1 v60.9,5.02 58.8,5.02 arc-90 58.1,5.71 58.1,8.76 | 85.98,63.37 85.98,62.17 arc64 86.3,61.66 arc8 87.57,61.15 arc-67 v88.65,59.82 | v94.49,58.29 arc-96 95.69,57.59 arc13 96.14,56.26 arc65 96.84,55.82 98.04,55.82 | 88.65,49.34 arc-79 87.82,48.26 arc2 86.55,47.94 arc75 85.92,47.12 85.92,45.85 | 102.55,40.64 102.55,39.88 arc90 103.12,39.31 v104.97,39.31
  Top 0.813: E$75.P$1 39.62,35.31 arc-35 38.61,33.27 arc46 37.59,30.73 37.59,27.69 arc90 38.61,26.67 E$65.P$4
  Bottom 0.305: v136.53,29.4 136.53,31.69 arc90 136.46,31.75
  Bottom 0.406: v62.99,24.38 E$57.P$2 | E$54.P$1 v72.71,34.29 | 69.91,39.37 v72.71,39.37 | E$52.P$1 v72.71,41.91
  other vias: 77.85,18.41 88.65,49.4 38.35,37.85 40.89,37.85 60.96,57.15
  pour Route3 (isolate 0.406, no thermals): 10.16,111.76 154.94,111.76 154.94,106.68 157.48,104.14 162.56,104.14 162.56,10.16 157.48,10.16 154.94,7.62 154.94,2.54 10.16,2.54 10.16,7.62 7.62,10.16 2.54,10.16 2.54,104.14 7.62,104.14 10.16,106.68
(copper drawn outside any net)
  shapes: Bottom area x2, Top area x7